# Altium PCB fmc-interposer.PcbDoc
Units mil, origin at the board's own origin, x right, y up, seen from the top; angles counter-clockwise.
Board outline 3543.31 x 3346.46 mil, 4 copper layers (Component Side, Ground Plane, Power Plane, Solder Side), stack 33.234 mil thick; 10 components, 68 nets, 318 pads, 77 vias.
Unrouted connection lines stored in the file: 24.
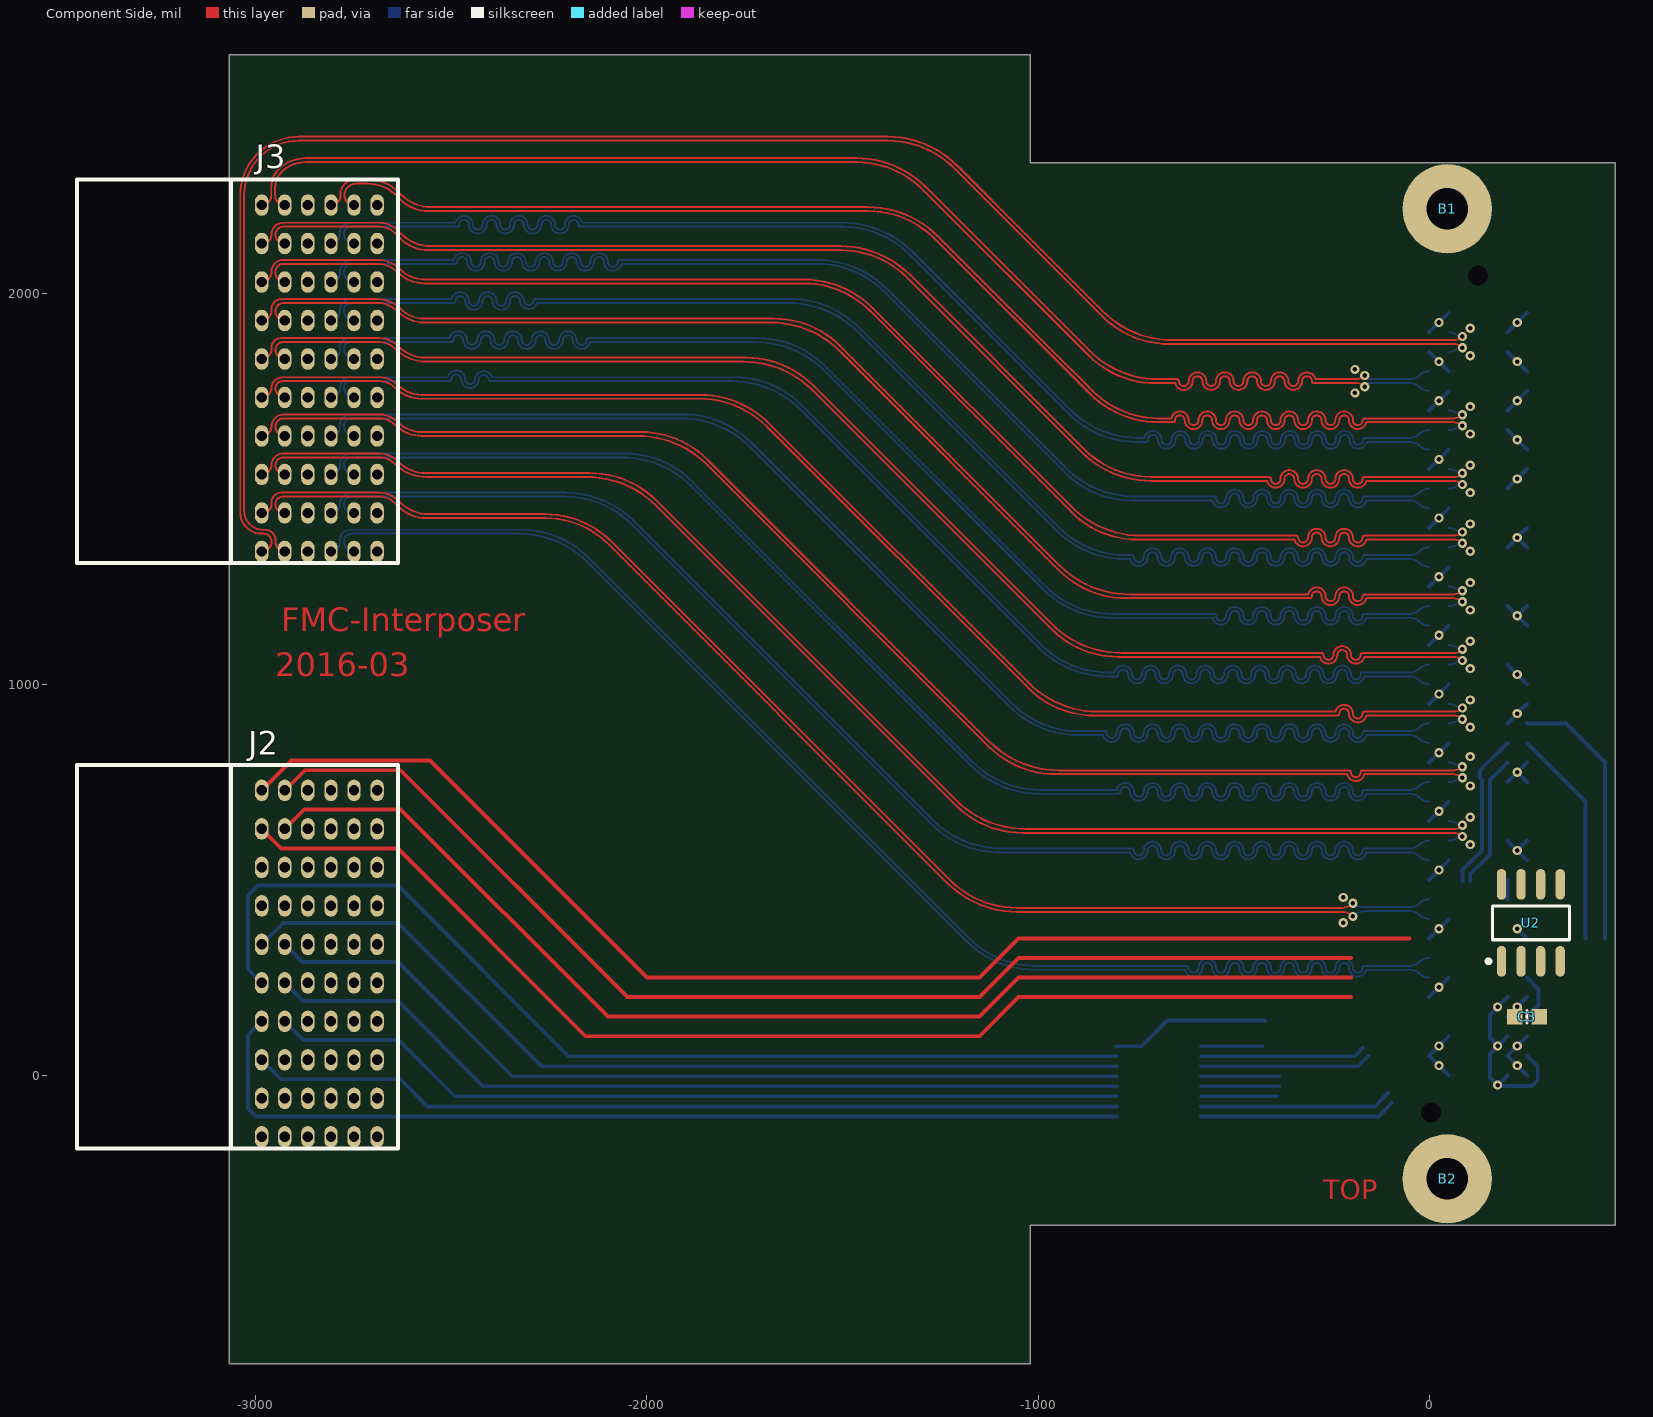
[diagram p0: Component Side view]
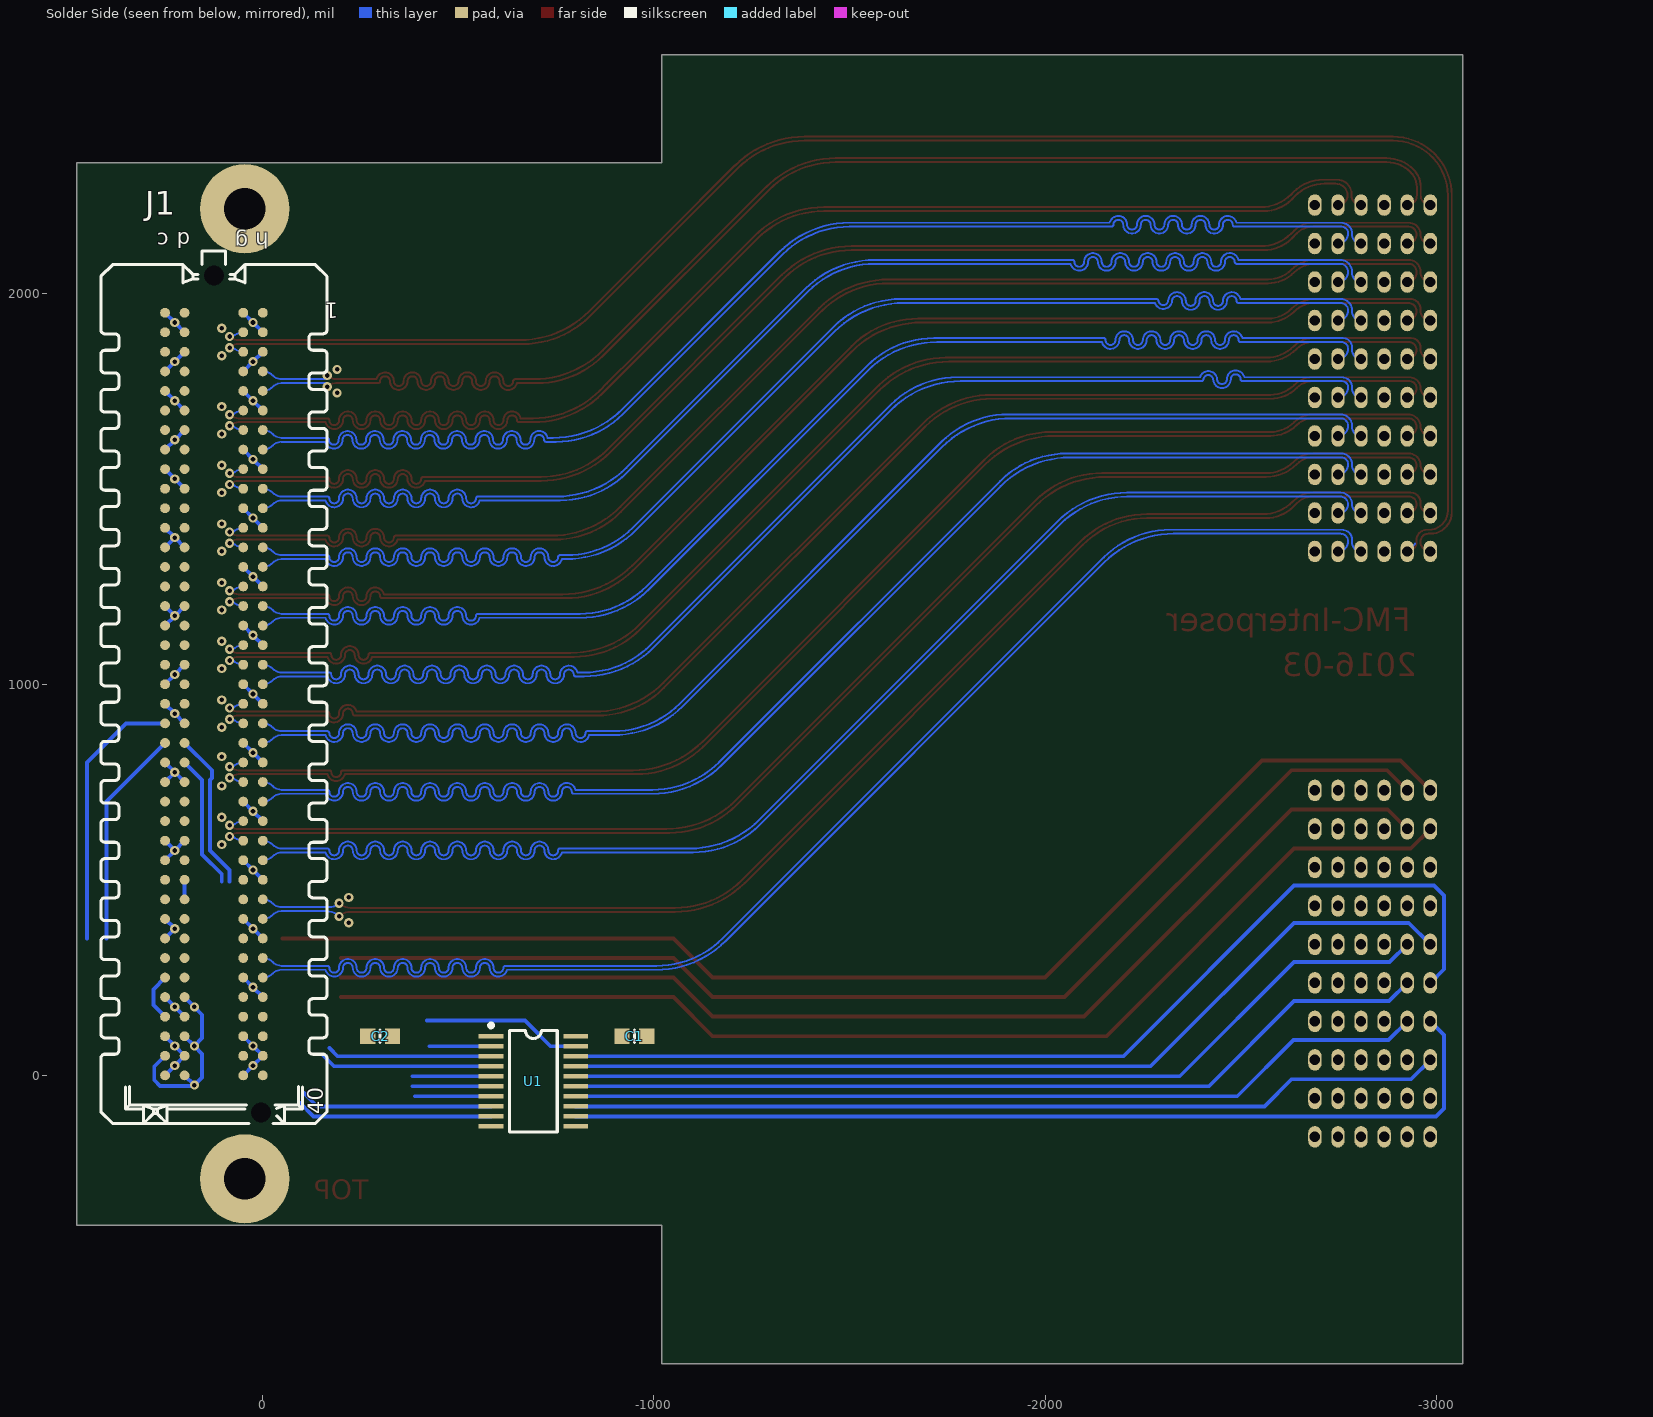
[diagram p1: Solder Side view, seen from below]
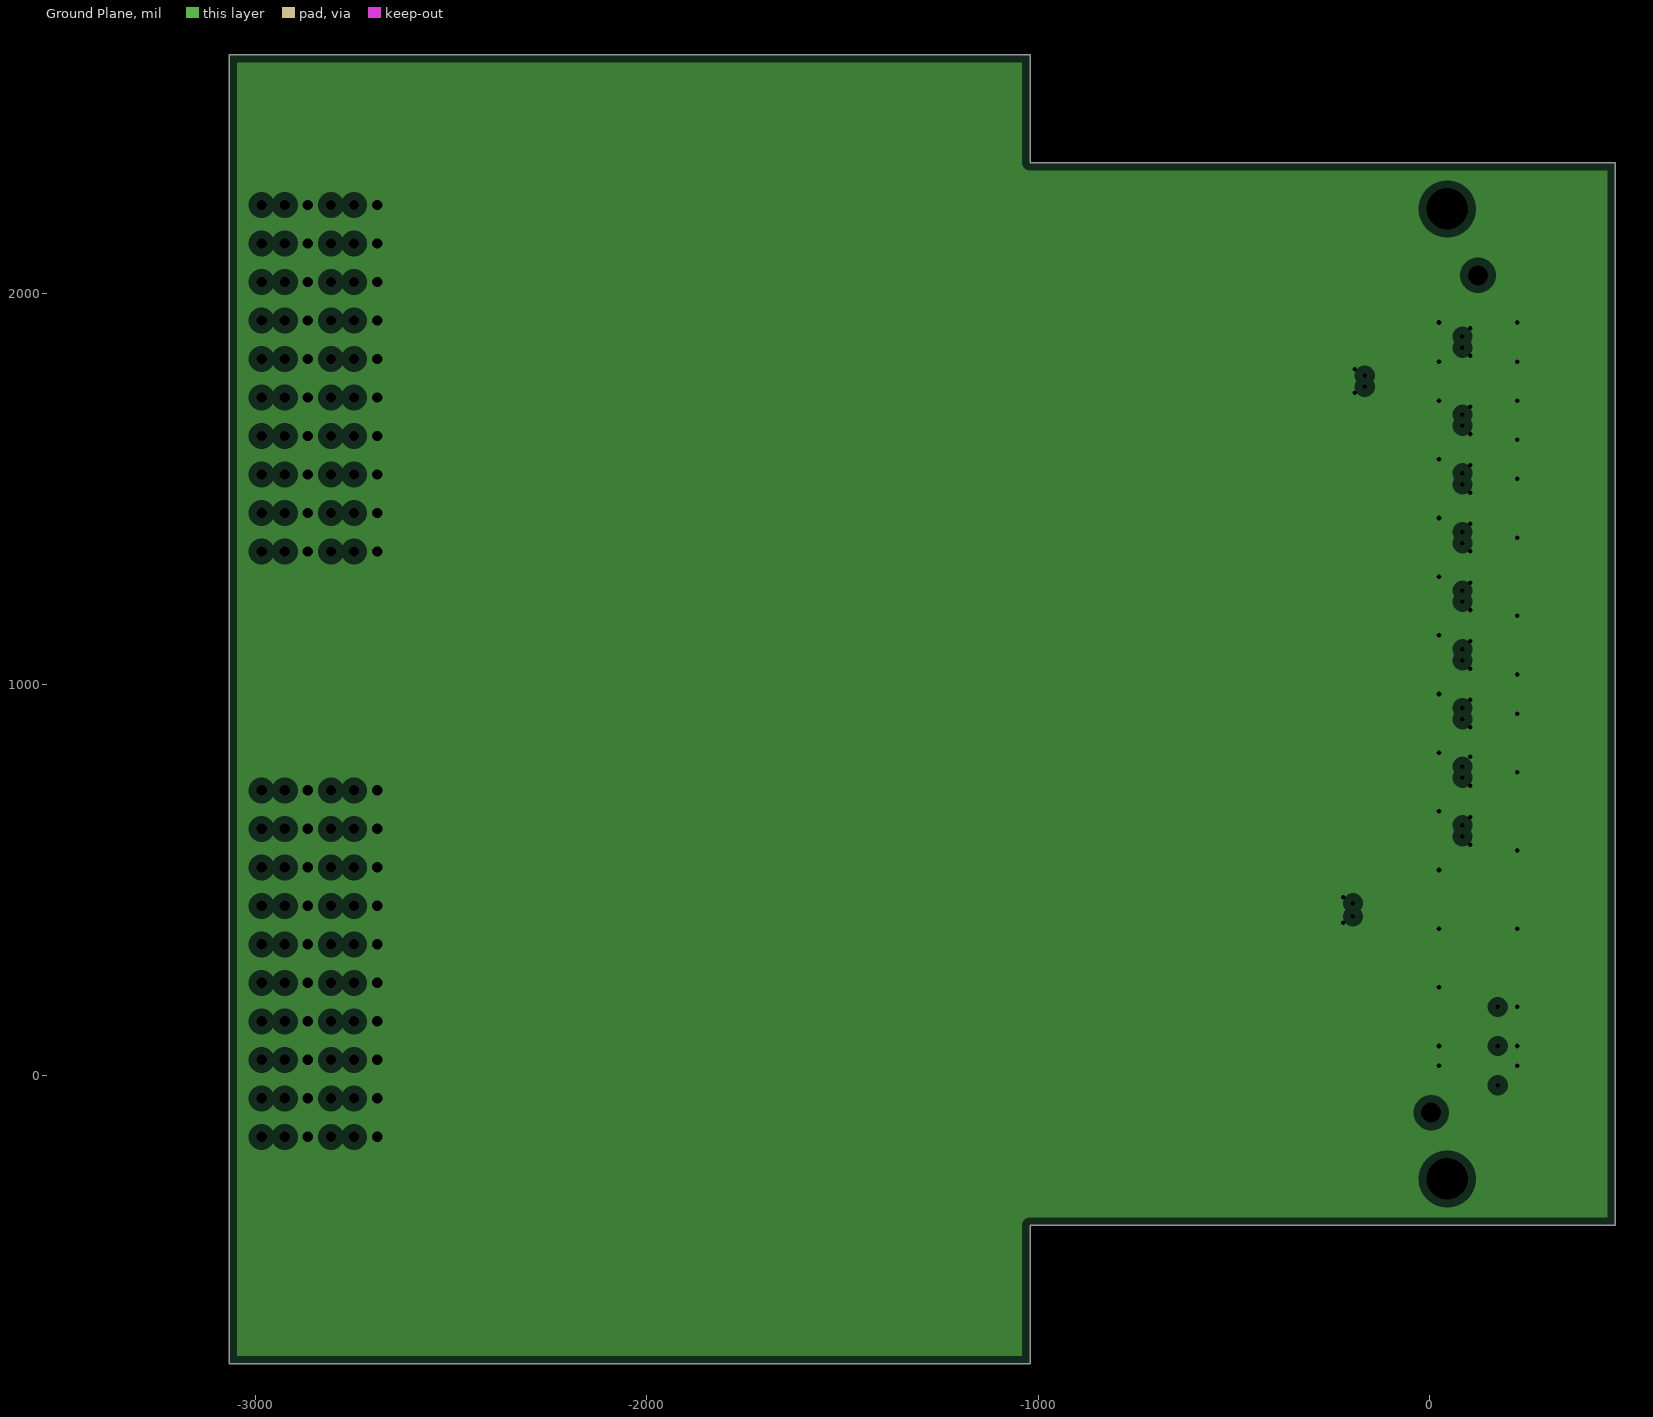
[diagram p2: Ground Plane, clearances drawn from the general rule]
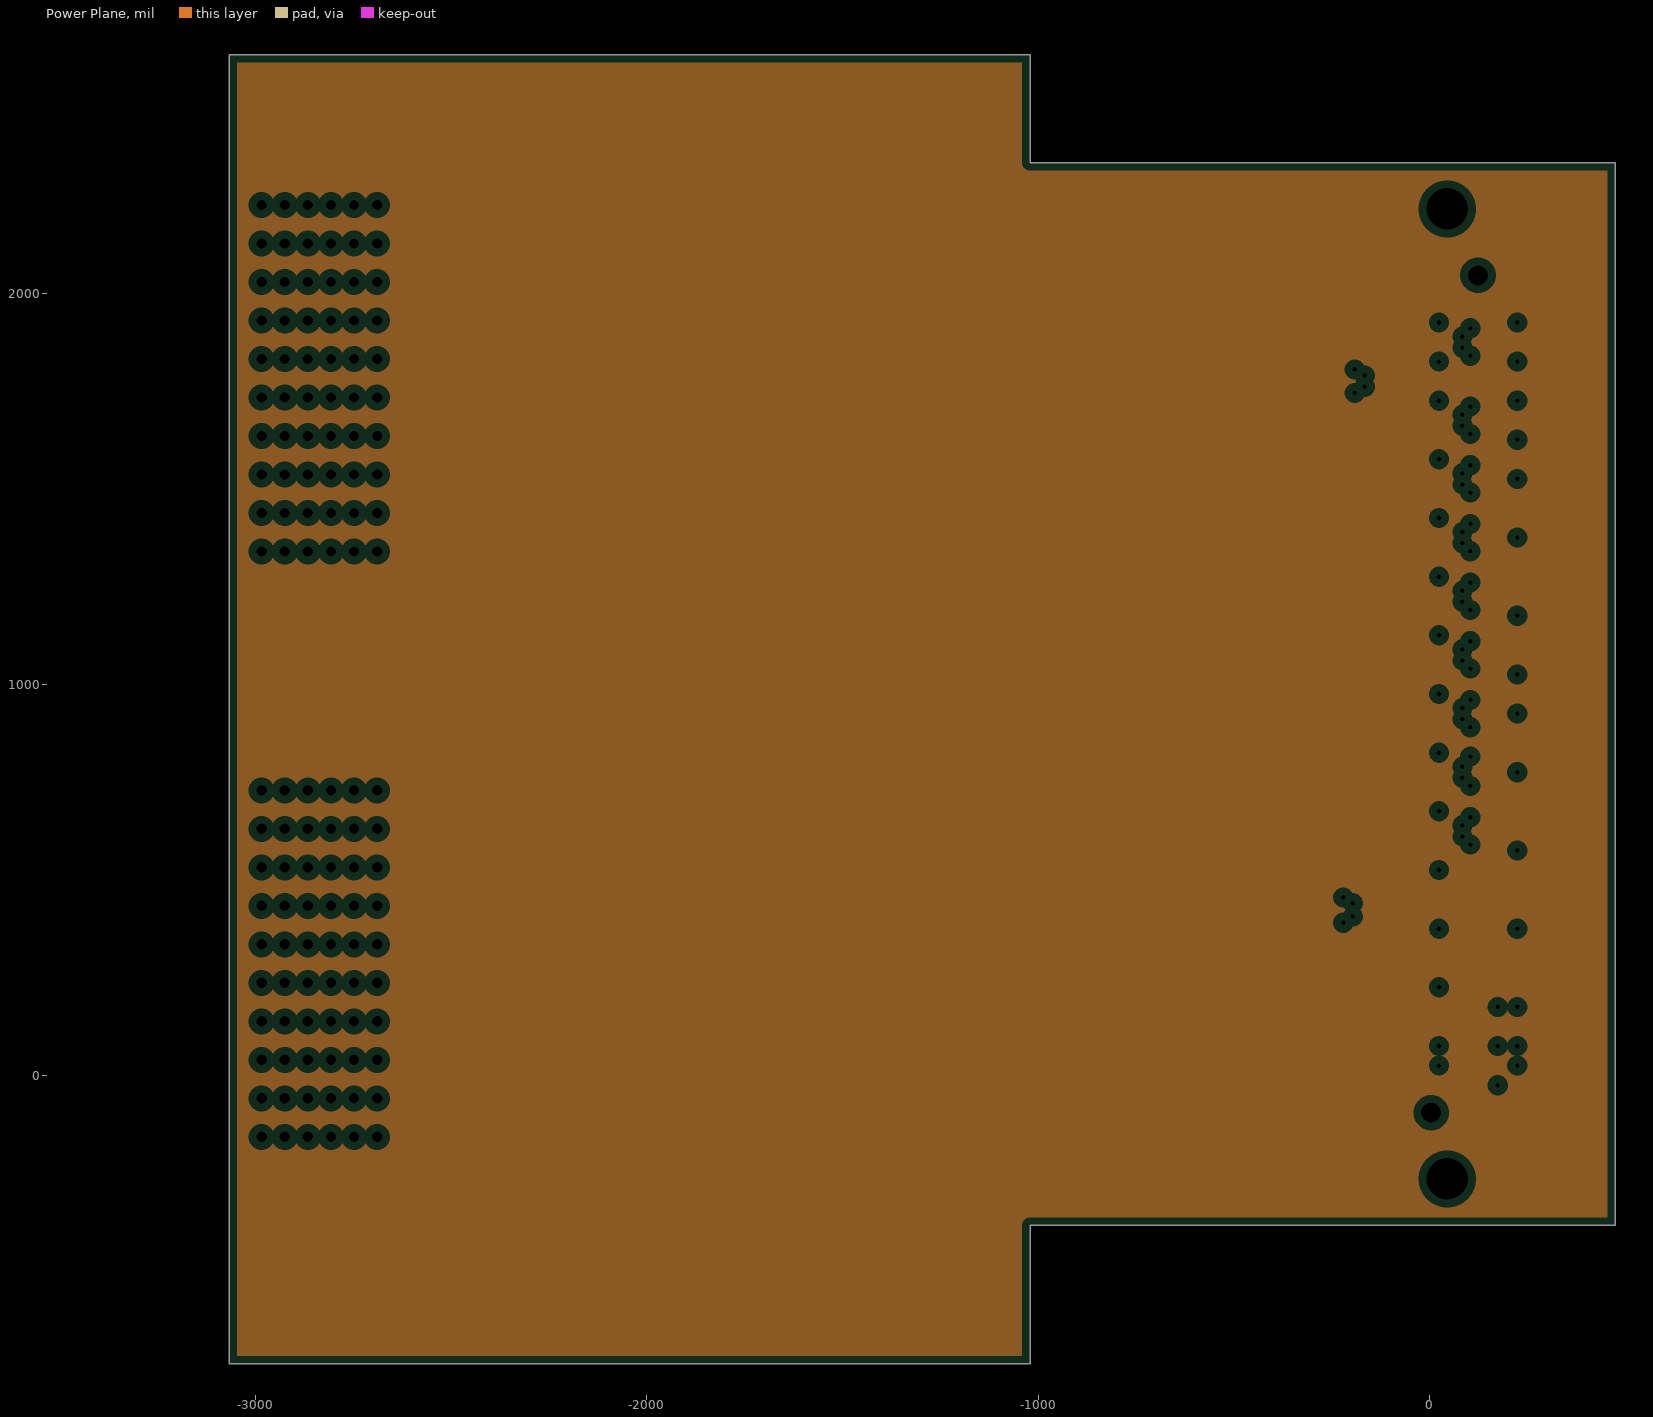
[diagram p3: Power Plane, clearances drawn from the general rule]

## Layer stack, top to bottom
Top Solder: solder mask 0.4, Solder Resist, Dk 3.5
Component Side: signal copper 1.4
Dielectric 1: core 12.6, FR-4, Dk 4.8
Ground Plane: plane copper 1.4169, net GND
Dielectric 3: prepreg 5, Dk 4.2
Power Plane: plane copper 1.4169
Dielectric 4: core 10, Dk 4.2
Solder Side: signal copper 1.4
Bottom Solder: solder mask 0.4, Solder Resist, Dk 3.5

## Board outline
-3067.91,-737.24 -3067.91,2609.21 -1020.67,2609.21 -1020.67,2333.62 475.39,2333.62 475.39,-382.91 -1020.67,-382.91 -1020.67,-737.24

## Design rules (kind name [scope] priority, off if disabled: settings)
Clearance Clearance_1 [All vs (InDifferentialPairClass('All Differential Pairs'))] p1: gap=5
Clearance [All] p2: gap=10
DiffPairsRouting [All] p1: maxlimit=10 minlimit=5 mostfreqgap=5 toplayer_minwidth=5 toplayer_maxwidth=15 toplayer_prefwidth=5 bottomlayer_minwidth=5 bottomlayer_maxwidth=15 bottomlayer_prefwidth=5 maxuncoupledlength=500
Length All [All] p1: maxlimit=3543.16 minlimit=0
PlaneClearance [All] p1: clearance=20
PlaneConnect PlaneConnect_1 [isVia] p1: planeconnectstyle=Direct reliefexpansion=20 reliefentries=4 reliefconductorwidth=10 reliefairgap=10
PlaneConnect [All] p2: planeconnectstyle=Relief reliefexpansion=20 reliefentries=4 reliefconductorwidth=20 reliefairgap=10
PolygonConnect [All] p1: connectstyle=Relief reliefconductorwidth=10 reliefentries=4 polygonreliefangle="90 Angle" airgapwidth=10
RoutingCorners [(InDifferentialPairClass('All Differential Pairs'))] p1: cornerstyle=Round minsetback=1000 maxsetback=100
RoutingCorners RoutingCorners_1 [All] p2: cornerstyle=45-Degree minsetback=100 maxsetback=100
RoutingVias [All] p1: holewidth=11.81 width=23.62 viastyle="Through Hole" minholewidth=11.81 minwidth=19.68 maxholewidth=11.81 maxwidth=23.62
SolderMaskExpansion [All] p1: expansion=4
Width [All] p1: maxlimit=100 minlimit=6 preferedwidth=10 minimp=50.000000 maximp=50.000000 favimp=50.000000
26 further rules are at their usual default settings.

## Classes and differential pairs
component class fmc-interposer: C1 C2 C3 J1 J2 J3 U1 U2
differential pair D15: +D15_P -D15_N
differential pair D14: +D14_P -D14_N
differential pair D13: +D13_P -D13_N
differential pair D12: +D12_P -D12_N
differential pair D11: +D11_P -D11_N
differential pair D10: +D10_P -D10_N
differential pair D9: +D9_P -D9_N
differential pair D8: +D8_P -D8_N
differential pair D7: +D7_P -D7_N
differential pair D6: +D6_P -D6_N
differential pair D5: +D5_P -D5_N
differential pair D4: +D4_P -D4_N
differential pair D3: +D3_P -D3_N
differential pair D2: +D2_P -D2_N
differential pair D1: +D1_P -D1_N
differential pair D0: +D0_P -D0_N
differential pair DCLK2: +DCLK2_P -DCLK2_N
differential pair D17: +D17_P -D17_N
differential pair D16: +D16_P -D16_N
differential pair DCLK1: +DCLK1_P -DCLK1_N

## Components (designator, comment, footprint, x,y, rotation, side; value= is the part's Value field where it differs from the comment)
B1 "Plated Hole" MTG300_600#1 -642.16,2053.94 r0 top locked
B2 "Plated Hole" MTG300_600#2 -542.16,-236.06 r0 top locked
C1 "100n" capc1608n -950,100 r180 bottom
C2 "100n" capc1608n -300,100 r0 bottom
C3 "100n" capc1608n 250,150 r0 top
J1 "VITA 57" SAMTEC_ASP-127797-01 125,975 r90 bottom locked
J2 "Control" Analog_Conn2 -2985.24,-157.24 r270 top locked
J3 "Data Lines" Analog_Conn2 -2985.24,1339.53 r270 top locked
U1 "TXB0108" TSSOP20 -691.73,-15.16 r270 bottom
U2 "M24C02MN6" SOP8_N 260,390 r90 top

## Footprints (in the part's own frame and the unit in brackets; to place one, negate y for a bottom-side part, rotate by r counter-clockwise, add the part's x,y. Pads: shape width x height; smd on the part's side, far side on the other; paste and mask are expansions set on the pad)
Analog_Conn2 [mm]
  oval 1.397x0.864 hole 0.675: A1(0,0) A2(-2.5,0) A3(-5,0) A4(-7.5,0) A5(-10,0) A6(-12.5,0) A7(-15,0) A8(-17.5,0) A9(-20,0) A10(-22.5,0) B1(0,1.5) B2(-2.5,1.5) B3(-5,1.5) B4(-7.5,1.5) B5(-10,1.5) B6(-12.5,1.5) B7(-15,1.5) B8(-17.5,1.5) B9(-20,1.5) B10(-22.5,1.5) BG1(0,3) BG2(-2.5,3) BG3(-5,3) BG4(-7.5,3) BG5(-10,3) BG6(-12.5,3) BG7(-15,3) BG8(-17.5,3) BG9(-20,3) BG10(-22.5,3) C1(0,4.5) C2(-2.5,4.5) C3(-5,4.5) C4(-7.5,4.5) C5(-10,4.5) C6(-12.5,4.5) C7(-15,4.5) C8(-17.5,4.5) C9(-20,4.5) C10(-22.5,4.5) D1(0,6) D2(-2.5,6) D3(-5,6) D4(-7.5,6) D5(-10,6) D6(-12.5,6) D7(-15,6) D8(-17.5,6) D9(-20,6) D10(-22.5,6) DG1(0,7.5) DG2(-2.5,7.5) DG3(-5,7.5) DG4(-7.5,7.5) DG5(-10,7.5) DG6(-12.5,7.5) DG7(-15,7.5) DG8(-17.5,7.5) DG9(-20,7.5) DG10(-22.5,7.5)
  silkscreen extent -24.15,-12 0.75,8.85
capc1608n [mm]
  rect 1x1 smd: 1(-0.803,-0.007) 2(0.797,-0.007)
  silkscreen extent 0,-0.41 0,0.39
MTG300_600#1 [mm] "Plated Through Hole: Hole Dia.=3.0mm Pad Dia.=6.0mm"
  round 5.8 hole 2.7: 1(17.486,4.104)
MTG300_600#2 [mm] "Plated Through Hole: Hole Dia.=3.0mm Pad Dia.=6.0mm"
  round 5.8 hole 2.7: 1(14.946,-0.73)
SAMTEC_ASP-127797-01 [mm] "Connector VITA 57, 160 Male contacts in 4 row cdgh"
  round 1 hole 1.3 unplated mask+0.3: 1(-27.191,-3.048) 2(27.191,0)
  round 0.64 smd: c1(24.765,3.175) c2(23.495,3.175) c3(22.225,3.175) c4(20.955,3.175) c5(19.685,3.175) c6(18.415,3.175) c7(17.145,3.175) c8(15.875,3.175) c9(14.605,3.175) c10(13.335,3.175) c11(12.065,3.175) c12(10.795,3.175) c13(9.525,3.175) c14(8.255,3.175) c15(6.985,3.175) c16(5.715,3.175) c17(4.445,3.175) c18(3.175,3.175) c19(1.905,3.175) c20(0.635,3.175) c21(-0.635,3.175) c22(-1.905,3.175) c23(-3.175,3.175) c24(-4.445,3.175) c25(-5.715,3.175) c26(-6.985,3.175) c27(-8.255,3.175) c28(-9.525,3.175) c29(-10.795,3.175) c30(-12.065,3.175) c31(-13.335,3.175) c32(-14.605,3.175) c33(-15.875,3.175) c34(-17.145,3.175) c35(-18.415,3.175) c36(-19.685,3.175) c37(-20.955,3.175) c38(-22.225,3.175) c39(-23.495,3.175) c40(-24.765,3.175) d1(24.765,1.905) d2(23.495,1.905) d3(22.225,1.905) d4(20.955,1.905) d5(19.685,1.905) d6(18.415,1.905) d7(17.145,1.905) d8(15.875,1.905) d9(14.605,1.905) d10(13.335,1.905) d11(12.065,1.905) d12(10.795,1.905) d13(9.525,1.905) d14(8.255,1.905) d15(6.985,1.905) d16(5.715,1.905) d17(4.445,1.905) d18(3.175,1.905) d19(1.905,1.905) d20(0.635,1.905) d21(-0.635,1.905) d22(-1.905,1.905) d23(-3.175,1.905) d24(-4.445,1.905) d25(-5.715,1.905) d26(-6.985,1.905) d27(-8.255,1.905) d28(-9.525,1.905) d29(-10.795,1.905) d30(-12.065,1.905) d31(-13.335,1.905) d32(-14.605,1.905) d33(-15.875,1.905) d34(-17.145,1.905) d35(-18.415,1.905) d36(-19.685,1.905) d37(-20.955,1.905) d38(-22.225,1.905) d39(-23.495,1.905) d40(-24.765,1.905) g1(24.765,-1.905) g2(23.495,-1.905) g3(22.225,-1.905) g4(20.955,-1.905) g5(19.685,-1.905) g6(18.415,-1.905) g7(17.145,-1.905) g8(15.875,-1.905) g9(14.605,-1.905) g10(13.335,-1.905) g11(12.065,-1.905) g12(10.795,-1.905) g13(9.525,-1.905) g14(8.255,-1.905) g15(6.985,-1.905) g16(5.715,-1.905) g17(4.445,-1.905) g18(3.175,-1.905) g19(1.905,-1.905) g20(0.635,-1.905) g21(-0.635,-1.905) g22(-1.905,-1.905) g23(-3.175,-1.905) g24(-4.445,-1.905) g25(-5.715,-1.905) g26(-6.985,-1.905) g27(-8.255,-1.905) g28(-9.525,-1.905) g29(-10.795,-1.905) g30(-12.065,-1.905) g31(-13.335,-1.905) g32(-14.605,-1.905) g33(-15.875,-1.905) g34(-17.145,-1.905) g35(-18.415,-1.905) g36(-19.685,-1.905) g37(-20.955,-1.905) g38(-22.225,-1.905) g39(-23.495,-1.905) g40(-24.765,-1.905) h1(24.765,-3.175) h2(23.495,-3.175) h3(22.225,-3.175) h4(20.955,-3.175) h5(19.685,-3.175) h6(18.415,-3.175) h7(17.145,-3.175) h8(15.875,-3.175) h9(14.605,-3.175) h10(13.335,-3.175) h11(12.065,-3.175) h12(10.795,-3.175) h13(9.525,-3.175) h14(8.255,-3.175) h15(6.985,-3.175) h16(5.715,-3.175) h17(4.445,-3.175) h18(3.175,-3.175) h19(1.905,-3.175) h20(0.635,-3.175) h21(-0.635,-3.175) h22(-1.905,-3.175) h23(-3.175,-3.175) h24(-4.445,-3.175) h25(-5.715,-3.175) h26(-6.985,-3.175) h27(-8.255,-3.175) h28(-9.525,-3.175) h29(-10.795,-3.175) h30(-12.065,-3.175) h31(-13.335,-3.175) h32(-14.605,-3.175) h33(-15.875,-3.175) h34(-17.145,-3.175) h35(-18.415,-3.175) h36(-19.685,-3.175) h37(-20.955,-3.175) h38(-22.225,-3.175) h39(-23.495,-3.175) h40(-24.765,-3.175)
  silkscreen extent -27.89,-7.34 28.78,7.34, body extent -27.89,-7.34 28.78,7.34, height 5.61
SOP8_N [mm] "SOIC, 8-Leads, Body 4.9x3.9mm, Pitch 1.27mm, IPC Medium Density"
  oval 2x0.6 smd: 1(-2.5,1.905) 2(-2.5,0.635) 3(-2.5,-0.635) 4(-2.5,-1.905) 5(2.5,-1.905) 6(2.5,-0.635) 7(2.5,0.635) 8(2.5,1.905)
  silkscreen extent -2.62,-2.5 1.1,2.88, body extent -2,-2.5 2,2.5, height 1.75
TSSOP20 [mm] "Shrink Small Outline; 20 Leads; Body Width 4.4 mm; Pitch 0.65 mm"
  rect 0.3x1.6 smd: 1(-2.925,-2.75) 2(-2.275,-2.75) 3(-1.625,-2.75) 4(-0.975,-2.75) 5(-0.325,-2.75) 6(0.325,-2.75) 7(0.975,-2.75) 8(1.625,-2.75) 9(2.275,-2.75) 10(2.925,-2.75) 11(2.925,2.75) 12(2.275,2.75) 13(1.625,2.75) 14(0.975,2.75) 15(0.325,2.75) 16(-0.325,2.75) 17(-0.975,2.75) 18(-1.625,2.75) 19(-2.275,2.75) 20(-2.925,2.75)
  silkscreen extent -3.75,-2.87 3.3,1.55

## Part data
B1 B2: library part PLATED_HOLE3.0_PAD6.0, "Single Terminal Socket"
C1 C2 C3: library part Cap, "Capacitor"
J1: "Connector VITA 57, 160 Male contacts in 4 row cdgh"
J2 J3: library part Analog_Conn2
U2: "2Kbit Serial I²C Bus EEPROM"

## Via types
v1: diameter 23.62, hole 11.81, Component Side to Solder Side, tented both sides, 52 vias
v2: diameter 23.62, hole 11.81, Component Side to Solder Side, 25 vias

## Nets (pads, with @x,y where several pads share a name; then routed paths per layer and width w, separated by ;. In a path a pad name is that pad's centre, name@x,y a point inside that pad or via, vN(x,y) a via of type N, cw(c..) or ccw(c..) an arc to the next point about the centre after c; other vN are vias at no path point)
3P3V: C1.2 J1.c39 J1.d36 J1.d38 J1.d40 U1.19 | length 930.2
  Solder Side w10: U1.19 -735.59,74.41 -670,140 -420,140 ; J1.d40 v2(175,-25) ; J1.d38 v2(175,75) ; J1.d36 v2(175,175) 155,155 155,95 v2(175,75) ; J1.c39 277.6,22.4 277.6,-12.4 262.4,-27.6 177.6,-27.6 v2(175,-25) ; v2(175,-25) 155,-5 155,55 v2(175,75)
3P3VAUX: C3.2 J1.d32 U2.8
12P0V: J1.c35 J1.c37 | length 124.9
  Solder Side w10: J1.c37 280,180 280,220 J1.c35
CSB1_C: J1.d26 U1.4 | length 439.6
  Solder Side w10: U1.4 -181.77,23.23 -155,50
CSB1_M: J2.A6 U1.17 | length 2360
  Solder Side w10: J2.A6 -2930.12,390 -2636.81,390 -2270.04,23.23 U1.17
CSB2_C: J1.d27 U1.3 | length 422.2
  Solder Side w10: U1.3 -191.18,48.82 -170,70
CSB2_M: J2.A5 U1.18 | length 2649
  Solder Side w10: J2.A5 -3020,271.22 -3020,460 -2995,485 -2636.81,485 -2200.63,48.82 U1.18
CSB3_C: J1.c26 U1.9 | length 502.8
  Solder Side w10: U1.9 -129.72,-104.72 -95,-70
CSB3_M: J2.A4 U1.12 | length 2465.8
  Solder Side w10: J2.A4 -3020,103.27 -3020,-85 -3000,-105 -2636.81,-105 -2636.54,-104.72 U1.12
CSB4_C: J1.c27 U1.8 | length 492.6
  Solder Side w10: U1.8 -139.13,-79.13 -105,-45
CSB4_M: J2.A3 U1.13 | length 2234.4
  Solder Side w10: J2.A3 -2935.63,-10 -2630,-10 -2560.87,-79.13 U1.13
D0_N: J1.h35 J3.D1 | length 3528.9
  Solder Side w5: J3.D1 cw(c-2749.02,1365.51) -2775,1365.51 cw(c-2755.51,1365.51) -2755.51,1385 -2328.97,1385 cw(c-2328.97,1134) -2151.51,1311.51 ; -2151.48,1311.48 -1183.52,343.52 ; -1183.49,343.49 ccw(c-1006.03,521) -1006.03,270 -624.44,270 ccw(c-602.5,275) -580,275 cw(c-567.5,275) -555,275 ccw(c-532.5,275) -510,275 cw(c-497.5,275) -485,275 ccw(c-462.5,275) -440,275 cw(c-427.5,275) -415,275 ccw(c-392.5,275) -370,275 cw(c-357.5,275) -345,275 ccw(c-322.5,275) -300,275 cw(c-287.5,275) -275,275 ccw(c-252.5,275) -230,275 cw(c-217.5,275) -205,275 ccw(c-182.5,275) -160.56,270 -48.28,270 cw(c-48.28,238.17) -25.77,260.68 ccw(c0,286.45) J1.h35
D0_P: J1.h34 J3.C1 | length 3548.9
  Solder Side w5: J3.C1 ccw(c-2808.07,1362.6) -2785,1362.6 -2785,1369.65 cw(c-2759.65,1369.65) -2759.65,1395 -2320.68,1395 cw(c-2320.68,1154) -2150.27,1324.41 -1176.44,350.59 ccw(c-1006.03,521) -1006.03,280 -620,280 cw(c-620,275) -615,275 ccw(c-602.5,275) -590,275 cw(c-567.5,275) -545,275 ccw(c-532.5,275) -520,275 cw(c-497.5,275) -475,275 ccw(c-462.5,275) -450,275 cw(c-427.5,275) -405,275 ccw(c-392.5,275) -380,275 cw(c-357.5,275) -335,275 ccw(c-322.5,275) -310,275 cw(c-287.5,275) -265,275 ccw(c-252.5,275) -240,275 cw(c-217.5,275) -195,275 ccw(c-182.5,275) -170,275 cw(c-165,275) -165,280 -48.28,280 ccw(c-48.28,311.83) -25.77,289.32 cw(c0,263.55) J1.h34
D1_N: J1.h32 J3.B2 | length 3422.6
  Component Side w5: J3.B2 -2927.95,1437.95 cw(c-2927.95,1460) -2950,1460 -2950,1460.86 cw(c-2930.86,1460.86) -2930.86,1480 -2685.1,1480 cw(c-2685.1,1421.72) -2643.88,1462.93 -2635.24,1454.29 ccw(c-2564.53,1525) -2564.53,1425 -2261.07,1425 cw(c-2261.07,1193.08) -2097.12,1357.13 cw(c-2261.07,1193.08) -2097.07,1357.07 -1231.71,491.71 ccw(c-1054.22,669.19) -1054.22,418.19 -223.51,418.19 cw(c-223.51,377.86) v2(-195,406.38)
  Solder Side w5: v2(-195,406.38) cw(c-162.11,373.49) -162.11,420 -48.28,420 cw(c-48.28,388.17) -25.77,410.68 ccw(c0,436.45) J1.h32
D1_P: J1.h31 J3.A2 | length 3439.7
  Component Side w5: J3.A2 -2982.05,1437.95 ccw(c-2982.05,1460) -2960,1460 -2960,1465 cw(c-2935,1465) -2935,1490 -2685.1,1490 cw(c-2685.1,1421.72) -2636.81,1470 -2634.03,1467.22 ccw(c-2556.25,1545) -2556.25,1435 -2260.68,1435 cw(c-2260.68,1194) -2090.27,1364.41 -1224.63,498.78 ccw(c-1054.22,669.19) -1054.22,428.19 -223.51,428.19 ccw(c-223.51,468.51) v2(-195,440)
  Solder Side w5: v2(-195,440) ccw(c-170.86,464.14) -170.86,430 -48.28,430 ccw(c-48.28,461.83) -25.77,439.32 cw(c0,413.55) J1.h31
D2_N: J1.h29 J3.D2 | length 3522.9
  Solder Side w5: J3.D2 -2752.95,1437.95 cw(c-2752.95,1460) -2775,1460 cw(c-2755,1460) -2755,1480 -2209.83,1480 cw(c-2209.83,1239) -2039.41,1409.41 -1270.59,640.59 ccw(c-1100.17,811) -1100.17,570 -764.44,570 ccw(c-742.5,575) -720,575 cw(c-707.5,575) -695,575 ccw(c-672.5,575) -650,575 cw(c-637.5,575) -625,575 ccw(c-602.5,575) -580,575 cw(c-567.5,575) -555,575 ccw(c-532.5,575) -510,575 cw(c-497.5,575) -485,575 ccw(c-462.5,575) -440,575 cw(c-427.5,575) -415,575 ccw(c-392.5,575) -370,575 cw(c-357.5,575) -345,575 ccw(c-322.5,575) -300,575 cw(c-287.5,575) -275,575 ccw(c-252.5,575) -230,575 cw(c-217.5,575) -205,575 ccw(c-182.5,575) -160.56,570 -48.28,570 cw(c-48.28,538.17) -25.77,560.68 ccw(c0,586.45) J1.h29
D2_P: J1.h28 J3.C2 | length 3538
  Solder Side w5: J3.C2 -2807.05,1437.95 ccw(c-2807.05,1460) -2785,1460 cw(c-2755,1460) -2755,1490 -2209.83,1490 cw(c-2209.83,1239) -2032.37,1416.51 ; -2032.34,1416.48 -1269.37,653.52 ccw(c-1091.89,831) -1091.89,580 -760,580 cw(c-760,575) -755,575 ccw(c-742.5,575) -730,575 cw(c-707.5,575) -685,575 ccw(c-672.5,575) -660,575 cw(c-637.5,575) -615,575 ccw(c-602.5,575) -590,575 cw(c-567.5,575) -545,575 ccw(c-532.5,575) -520,575 cw(c-497.5,575) -475,575 ccw(c-462.5,575) -450,575 cw(c-427.5,575) -405,575 ccw(c-392.5,575) -380,575 cw(c-357.5,575) -335,575 ccw(c-322.5,575) -310,575 cw(c-287.5,575) -265,575 ccw(c-252.5,575) -240,575 cw(c-217.5,575) -195,575 ccw(c-182.5,575) -170,575 cw(c-165,575) -165,580 -48.28,580 ccw(c-48.28,611.83) -25.77,589.32 cw(c0,563.55) J1.h28
D3_N: J1.g28 J3.B3 | length 3493.3
  Component Side w5: J3.B3 cw(c-2926.18,1560.2) -2950,1560.2 cw(c-2930.2,1560.2) -2930.2,1580 -2685.1,1580 cw(c-2685.1,1521.72) -2643.88,1562.93 -2643.17,1562.22 ccw(c-2565.39,1640) -2565.39,1530 -2153.97,1530 cw(c-2153.97,1279) -1976.51,1456.51 ; -1976.48,1456.48 -1210.59,690.59 ccw(c-1040.17,861) -1040.17,620 62.52,620 cw(c62.52,588.21) v2(85,610.69)
  Solder Side w5: J1.g28 ccw(c50,636.45) v2@75.77,610.68 ; v2@75.79,610.69 v2(85,610.69)
D3_P: J1.g27 J3.A3 | length 3511.2
  Component Side w5: J3.A3 ccw(c-2985.24,1561.61) -2960,1561.61 ; -2960,1560.2 cw(c-2930.2,1560.2) -2930.2,1590 -2685.1,1590 cw(c-2685.1,1521.72) -2636.81,1570 -2636.1,1569.29 ccw(c-2565.39,1640) -2565.39,1540 -2145.68,1540 cw(c-2145.68,1299) -1975.27,1469.41 -1209.37,703.52 ccw(c-1031.89,881) -1031.89,630 62.52,630 ccw(c62.52,661.79) v2(85,639.31)
  Solder Side w5: J1.g27 cw(c50,613.55) 75.77,639.32 v2(85,639.31)
D4_N: J1.h26 J3.D3 | length 3523.8
  Solder Side w5: J3.D3 cw(c-2749.02,1562.36) -2775,1562.36 cw(c-2757.36,1562.36) -2757.36,1580 -2063.97,1580 cw(c-2063.97,1329) -1886.51,1506.51 ; -1886.48,1506.48 -1173.52,793.52 ; -1173.49,793.49 ccw(c-996.03,971) -996.03,720 -795,720 ccw(c-795,725) -790,725 cw(c-777.5,725) -765,725 ccw(c-742.5,725) -720,725 cw(c-707.5,725) -695,725 ccw(c-672.5,725) -650,725 cw(c-637.5,725) -625,725 ccw(c-602.5,725) -580,725 cw(c-567.5,725) -555,725 ccw(c-532.5,725) -510,725 cw(c-497.5,725) -485,725 ccw(c-462.5,725) -440,725 cw(c-427.5,725) -415,725 ccw(c-392.5,725) -370,725 cw(c-357.5,725) -345,725 ccw(c-322.5,725) -300,725 cw(c-287.5,725) -275,725 ccw(c-252.5,725) -230,725 cw(c-217.5,725) -205,725 ccw(c-182.5,725) -160.56,720 -48.28,720 cw(c-48.28,688.17) -25.77,710.68 ccw(c0,736.45) J1.h26
D4_P: J1.h25 J3.C3 | length 3538.7
  Solder Side w5: J3.C3 ccw(c-2808.07,1559.45) -2785,1559.45 -2785,1562.36 cw(c-2757.36,1562.36) -2757.36,1590 -2055.68,1590 cw(c-2055.68,1349) -1885.27,1519.41 -1166.44,800.59 ccw(c-996.03,971) -996.03,730 -799.44,730 cw(c-777.5,725) -755,725 ccw(c-742.5,725) -730,725 cw(c-707.5,725) -685,725 ccw(c-672.5,725) -660,725 cw(c-637.5,725) -615,725 ccw(c-602.5,725) -590,725 cw(c-567.5,725) -545,725 ccw(c-532.5,725) -520,725 cw(c-497.5,725) -475,725 ccw(c-462.5,725) -450,725 cw(c-427.5,725) -405,725 ccw(c-392.5,725) -380,725 cw(c-357.5,725) -335,725 ccw(c-322.5,725) -310,725 cw(c-287.5,725) -265,725 ccw(c-252.5,725) -240,725 cw(c-217.5,725) -195,725 ccw(c-182.5,725) -170,725 cw(c-165,725) -165,730 -48.28,730 ccw(c-48.28,761.83) -25.77,739.32 cw(c0,713.55) J1.h25
D5_N: J1.g25 J3.B4 | length 3490.8
  Component Side w5: J3.B4 cw(c-2926.18,1658.62) -2950,1658.62 cw(c-2928.62,1658.62) -2928.62,1680 -2685.1,1680 cw(c-2685.1,1621.72) -2643.88,1662.93 ccw(c-2576.46,1730.36) -2576.46,1635 -2023.97,1635 cw(c-2023.97,1384) -1846.51,1561.51 ; -1846.48,1561.48 -1125.59,840.59 ccw(c-955.17,1011) -955.17,770 -946.89,770 -209.44,770 ccw(c-187.5,775) -165.56,770 62.52,770 cw(c62.52,738.21) v2(85,760.69)
  Solder Side w5: J1.g25 ccw(c50,786.45) v2@75.77,760.68 ; v2@75.79,760.69 v2(85,760.69)
D5_P: J1.g24 J3.A4 | length 3512
  Component Side w5: J3.A4 ccw(c-2985.24,1660.04) -2960,1660.04 ; -2960,1658.62 cw(c-2928.62,1658.62) -2928.62,1690 -2685.1,1690 cw(c-2685.1,1621.72) -2636.81,1670 ccw(c-2576.46,1730.36) -2576.46,1645 -2015.68,1645 cw(c-2015.68,1404) -1845.27,1574.41 -1124.37,853.52 ccw(c-946.89,1031) -946.89,780 -205,780 cw(c-205,775) -200,775 ccw(c-187.5,775) -175,775 cw(c-170,775) -170,780 62.52,780 ccw(c62.52,811.79) v2(85,789.31)
  Solder Side w5: J1.g24 cw(c50,763.55) 75.77,789.32 v2(85,789.31)
D6_N: J1.h23 J3.D4 | length 3522.3
  Solder Side w5: J3.D4 cw(c-2749.02,1660.79) -2775,1660.79 cw(c-2755.79,1660.79) -2755.79,1680 -1913.97,1680 cw(c-1913.97,1429) -1736.51,1606.51 ; -1736.48,1606.48 -1073.52,943.52 ; -1073.49,943.49 ccw(c-896.03,1121) -896.03,870 -834.44,870 ccw(c-812.5,875) -790,875 cw(c-777.5,875) -765,875 ccw(c-742.5,875) -720,875 cw(c-707.5,875) -695,875 ccw(c-672.5,875) -650,875 cw(c-637.5,875) -625,875 ccw(c-602.5,875) -580,875 cw(c-567.5,875) -555,875 ccw(c-532.5,875) -510,875 cw(c-497.5,875) -485,875 ccw(c-462.5,875) -440,875 cw(c-427.5,875) -415,875 ccw(c-392.5,875) -370,875 cw(c-357.5,875) -345,875 ccw(c-322.5,875) -300,875 cw(c-287.5,875) -275,875 ccw(c-252.5,875) -230,875 cw(c-217.5,875) -205,875 ccw(c-182.5,875) -160.56,870 -48.28,870 cw(c-48.28,838.17) -25.77,860.68 ccw(c0,886.45) J1.h23
D6_P: J1.h22 J3.C4 | length 3540.5
  Solder Side w5: J3.C4 ccw(c-2808.07,1657.87) -2785,1657.87 -2785,1660.79 cw(c-2755.79,1660.79) -2755.79,1690 -1905.68,1690 cw(c-1905.68,1449) -1735.27,1619.41 -1066.44,950.59 ccw(c-896.03,1121) -896.03,880 -830,880 cw(c-830,875) -825,875 ccw(c-812.5,875) -800,875 cw(c-777.5,875) -755,875 ccw(c-742.5,875) -730,875 cw(c-707.5,875) -685,875 ccw(c-672.5,875) -660,875 cw(c-637.5,875) -615,875 ccw(c-602.5,875) -590,875 cw(c-567.5,875) -545,875 ccw(c-532.5,875) -520,875 cw(c-497.5,875) -475,875 ccw(c-462.5,875) -450,875 cw(c-427.5,875) -405,875 ccw(c-392.5,875) -380,875 cw(c-357.5,875) -335,875 ccw(c-322.5,875) -310,875 cw(c-287.5,875) -265,875 ccw(c-252.5,875) -240,875 cw(c-217.5,875) -195,875 ccw(c-182.5,875) -170,875 cw(c-165,875) -165,880 -48.28,880 ccw(c-48.28,911.83) -25.77,889.32 cw(c0,863.55) J1.h22
D7_N: J1.g22 J3.B5 | length 3488.1
  Component Side w5: J3.B5 cw(c-2926.18,1757.05) -2950,1757.05 cw(c-2932.05,1757.05) -2932.05,1775 -2685.1,1775 cw(c-2685.1,1716.72) -2643.88,1757.93 ccw(c-2576.46,1825.36) -2576.46,1730 -1864.83,1730 cw(c-1864.83,1489) -1694.41,1659.41 -1025.59,990.59 ccw(c-855.17,1161) -855.17,920 -846.89,920 -235,920 ccw(c-235,925) -230,925 cw(c-217.5,925) -205,925 ccw(c-182.5,925) -160.56,920 62.52,920 cw(c62.52,888.21) v2(85,910.69)
  Solder Side w5: J1.g22 ccw(c50,936.45) v2@75.77,910.68 ; v2@75.79,910.69 v2(85,910.69)
D7_P: J1.g21 J3.A5 | length 3505.1
  Component Side w5: J3.A5 ccw(c-2985.24,1758.47) -2960,1758.47 ; -2960,1757.05 cw(c-2932.05,1757.05) -2932.05,1785 -2685.1,1785 cw(c-2685.1,1716.72) -2636.81,1765 ccw(c-2576.46,1825.36) -2576.46,1740 -1864.83,1740 cw(c-1864.83,1489) -1687.37,1666.51 ; -1687.34,1666.48 -1024.37,1003.52 ccw(c-846.89,1181) -846.89,930 -239.44,930 cw(c-217.5,925) -195,925 ccw(c-182.5,925) -170,925 cw(c-165,925) -165,930 62.52,930 ccw(c62.52,961.79) v2(85,939.31)
  Solder Side w5: J1.g21 cw(c50,913.55) 75.77,939.32 v2(85,939.31)
D8_N: J1.h20 J3.D5 | length 3535.7
  Solder Side w5: J3.D5 cw(c-2749.02,1759.21) -2775,1759.21 cw(c-2759.21,1759.21) -2759.21,1775 -2505,1775 ccw(c-2505,1780) -2500,1780 cw(c-2487.5,1780) -2475,1780 ccw(c-2452.5,1780) -2430,1779.69 cw(c-2417.5,1778.11) -2404.97,1779.46 ccw(c-2400,1780) -2400,1775 -1783.97,1775 cw(c-1783.97,1524) -1606.51,1701.51 ; -1606.48,1701.48 -998.52,1093.52 ; -998.49,1093.49 ccw(c-821.03,1271) -821.03,1020 -800,1020 ccw(c-800,1025) -795,1025 cw(c-782.5,1025) -770,1025 ccw(c-747.5,1025) -725,1025 cw(c-712.5,1025) -700,1025 ccw(c-677.5,1025) -655,1025 cw(c-642.5,1025) -630,1025 ccw(c-607.5,1025) -585,1025 cw(c-572.5,1025) -560,1025 ccw(c-537.5,1025) -515,1025 cw(c-502.5,1025) -490,1025 ccw(c-467.5,1025) -445,1025 cw(c-432.5,1025) -420,1025 ccw(c-397.5,1025) -375,1025 cw(c-362.5,1025) -350,1025 ccw(c-327.5,1025) -305,1025 cw(c-292.5,1025) -280,1025 ccw(c-257.5,1025) -235,1025 cw(c-222.5,1025) -210,1025 ccw(c-187.5,1025) -165.56,1020 -48.28,1020 cw(c-48.28,988.17) -25.77,1010.68 ccw(c0,1036.45) J1.h20
D8_P: J1.h19 J3.C5 | length 3547.2
  Solder Side w5: J3.C5 ccw(c-2808.07,1756.3) -2785,1756.3 -2785,1759.21 cw(c-2759.21,1759.21) -2759.21,1785 -2509.44,1785 cw(c-2487.5,1780) -2465,1780 ccw(c-2452.5,1780) -2440,1780 ; -2439.97,1780.54 cw(c-2417.5,1778.11) -2395.97,1785 -1775.68,1785 cw(c-1775.68,1544) -1605.27,1714.41 -991.44,1100.59 ccw(c-821.03,1271) -821.04,1030 -804.44,1030 cw(c-782.5,1025) -760,1025 ccw(c-747.5,1025) -735,1025 cw(c-712.5,1025) -690,1025 ccw(c-677.5,1025) -665,1025 cw(c-642.5,1025) -620,1025 ccw(c-607.5,1025) -595,1025 cw(c-572.5,1025) -550,1025 ccw(c-537.5,1025) -525,1025 cw(c-502.5,1025) -480,1025 ccw(c-467.5,1025) -455,1025 cw(c-432.5,1025) -410,1025 ccw(c-397.5,1025) -385,1025 cw(c-362.5,1025) -340,1025 ccw(c-327.5,1025) -315,1025 cw(c-292.5,1025) -270,1025 ccw(c-257.5,1025) -245,1025 cw(c-222.5,1025) -200,1025 ccw(c-187.5,1025) -175,1025 cw(c-170,1025) -170,1030 -48.28,1030 ccw(c-48.28,1061.83) -25.77,1039.32 cw(c0,1013.55) J1.h19
D9_N: J1.g19 J3.B6 | length 3485.6
  Component Side w5: J3.B6 cw(c-2926.18,1855.47) -2950,1855.47 cw(c-2930.47,1855.47) -2930.47,1875 -2685.1,1875 cw(c-2685.1,1816.72) -2643.88,1857.93 -2643.17,1857.22 ccw(c-2565.39,1935) -2565.39,1825 -1753.97,1825 cw(c-1753.97,1574) -1576.51,1751.51 ; -1576.48,1751.48 -965.59,1140.59 ccw(c-795.17,1311) -795.17,1070 -786.89,1070 -279.44,1070 ccw(c-257.5,1075) -235,1075 cw(c-222.5,1075) -210,1075 ccw(c-187.5,1075) -165.56,1070 62.52,1070 cw(c62.52,1038.21) v2(85,1060.69)
  Solder Side w5: J1.g19 ccw(c50,1086.45) v2@75.77,1060.68 ; v2@75.79,1060.69 v2(85,1060.69)
D9_P: J1.g18 J3.A6 | length 3507.7
  Component Side w5: J3.A6 ccw(c-2985.24,1856.89) -2960,1856.89 -2960,1861.03 cw(c-2936.03,1861.03) -2936.03,1885 -2685.1,1885 cw(c-2685.1,1816.72) -2636.81,1865 -2636.1,1864.29 ccw(c-2565.39,1935) -2565.39,1835 -1745.68,1835 cw(c-1745.68,1594) -1575.27,1764.41 -964.37,1153.52 ccw(c-786.89,1331) -786.89,1080 -275,1080 cw(c-275,1075) -270,1075 ccw(c-257.5,1075) -245,1075 cw(c-222.5,1075) -200,1075 ccw(c-187.5,1075) -175,1075 cw(c-170,1075) -170,1080 62.52,1080 ccw(c62.52,1111.79) v2(85,1089.31)
  Solder Side w5: J1.g18 cw(c50,1063.55) 75.77,1089.32 v2(85,1089.31)
D10_N: J1.h17 J3.D6 | length 3526.1
  Solder Side w5: J3.D6 cw(c-2749.02,1857.64) -2775,1857.64 cw(c-2757.64,1857.64) -2757.64,1875 -2500,1875 ccw(c-2500,1880) -2495,1880 cw(c-2482.5,1880) -2470,1880 ccw(c-2447.5,1880) -2425,1880 cw(c-2412.5,1880) -2400,1880 ccw(c-2377.5,1880) -2355,1880 cw(c-2342.5,1880) -2330,1880 ccw(c-2307.5,1880) -2285,1880 cw(c-2272.5,1880) -2260,1880 ccw(c-2237.5,1880) -2215,1880 cw(c-2202.5,1880) -2190,1880 ccw(c-2167.5,1880) -2145.56,1875 -1723.97,1875 cw(c-1723.97,1624) -1546.51,1801.51 ; -1546.48,1801.48 -988.52,1243.52 ; -988.49,1243.49 ccw(c-811.03,1421) -811.03,1170 -570,1170 ; -580,1170 -554.44,1170 ccw(c-532.5,1175) -510,1175 cw(c-497.5,1175) -485,1175 ccw(c-462.5,1175) -440,1175 cw(c-427.5,1175) -415,1175 ccw(c-392.5,1175) -370,1175 cw(c-357.5,1175) -345,1175 ccw(c-322.5,1175) -300,1175 cw(c-287.5,1175) -275,1175 ccw(c-252.5,1175) -230,1175 cw(c-217.5,1175) -205,1175 ccw(c-182.5,1175) -160.56,1170 -48.28,1170 cw(c-48.28,1138.17) -25.77,1160.68 ccw(c0,1186.45) J1.h17
D10_P: J1.h16 J3.C6 | length 3544.3
  Solder Side w5: J3.C6 ccw(c-2808.07,1854.73) -2785,1854.73 -2785,1860 ; -2785,1861.78 cw(c-2761.78,1861.78) -2761.78,1885 -2504.44,1885 cw(c-2482.5,1880) -2460,1880 ccw(c-2447.5,1880) -2435,1880 cw(c-2412.5,1880) -2390,1880 ccw(c-2377.5,1880) -2365,1880 cw(c-2342.5,1880) -2320,1880 ccw(c-2307.5,1880) -2295,1880 cw(c-2272.5,1880) -2250,1880 ccw(c-2237.5,1880) -2225,1880 cw(c-2202.5,1880) -2180,1880 ccw(c-2167.5,1880) -2155,1880 cw(c-2150,1880) -2150,1885 -1715.68,1885 cw(c-1715.68,1644) -1545.27,1814.41 -981.44,1250.59 ccw(c-811.03,1421) -811.03,1180 -570,1180 ; -580,1180 -550,1180 cw(c-550,1175) -545,1175 ccw(c-532.5,1175) -520,1175 cw(c-497.5,1175) -475,1175 ccw(c-462.5,1175) -450,1175 cw(c-427.5,1175) -405,1175 ccw(c-392.5,1175) -380,1175 cw(c-357.5,1175) -335,1175 ccw(c-322.5,1175) -310,1175 cw(c-287.5,1175) -265,1175 ccw(c-252.5,1175) -240,1175 cw(c-217.5,1175) -195,1175 ccw(c-182.5,1175) -170,1175 cw(c-165,1175) -165,1180 -48.28,1180 ccw(c-48.28,1211.83) -25.77,1189.32 cw(c0,1163.55) J1.h16
D11_N: J1.g16 J3.B7 | length 3487.3
  Component Side w5: J3.B7 cw(c-2926.18,1953.9) -2950,1953.9 cw(c-2928.9,1953.9) -2928.9,1975 -2690.36,1975 cw(c-2690.36,1899.64) -2637.07,1952.93 ccw(c-2569.64,2020.36) -2569.64,1925 -1683.97,1925 cw(c-1683.97,1674) -1506.51,1851.51 ; -1506.48,1851.48 -945.59,1290.59 ccw(c-775.17,1461) -775.17,1220 -766.89,1220 -305,1220 ccw(c-305,1225) -300,1225 cw(c-287.5,1225) -275,1225 ccw(c-252.5,1225) -230,1225 cw(c-217.5,1225) -205,1225 ccw(c-182.5,1225) -160.56,1220 62.52,1220 cw(c62.52,1188.21) v2(85,1210.69)
  Solder Side w5: J1.g16 ccw(c50,1236.45) v2@75.77,1210.68 ; v2@75.79,1210.69 v2(85,1210.69)
D11_P: J1.g15 J3.A7 | length 3506.2
  Component Side w5: J3.A7 ccw(c-2985.24,1955.32) -2960,1955.32 -2960,1959.46 cw(c-2934.46,1959.46) -2934.46,1985 -2690.36,1985 cw(c-2690.36,1899.64) -2630,1960 ccw(c-2569.64,2020.36) -2569.64,1935 -1675.68,1935 cw(c-1675.68,1694) -1505.27,1864.41 -944.37,1303.52 ccw(c-766.89,1481) -766.89,1230 -309.44,1230 cw(c-287.5,1225) -265,1225 ccw(c-252.5,1225) -240,1225 cw(c-217.5,1225) -195,1225 ccw(c-182.5,1225) -170,1225 cw(c-165,1225) -165,1230 62.52,1230 ccw(c62.52,1261.79) v2(85,1239.31)
  Solder Side w5: J1.g15 cw(c50,1213.55) 75.77,1239.32 v2(85,1239.31)
D12_N: J1.h14 J3.D7 | length 3532.2
  Solder Side w5: J3.D7 cw(c-2749.02,1956.06) -2775,1956.06 cw(c-2756.06,1956.06) -2756.06,1975 -2495,1975 ccw(c-2495,1980) -2490,1980 cw(c-2477.5,1980) -2465,1980 ccw(c-2442.5,1980) -2420,1980 cw(c-2407.5,1980) -2395,1980 ccw(c-2372.5,1980) -2350,1980 cw(c-2337.5,1980) -2325,1980 ; -2324.96,1979.41 ccw(c-2302.5,1982.09) -2281.02,1975 -1638.97,1975 cw(c-1638.97,1724) -1461.51,1901.51 ; -1461.48,1901.48 -953.52,1393.52 ; -953.49,1393.49 ccw(c-776.03,1571) -776.04,1320 -764.44,1320 ccw(c-742.5,1325) -720,1325 cw(c-707.5,1325) -695,1325 ccw(c-672.5,1325) -650,1325 cw(c-637.5,1325) -625,1325 ccw(c-602.5,1325) -580,1325 cw(c-567.5,1325) -555,1325 ccw(c-532.5,1325) -510,1325 cw(c-497.5,1325) -485,1325 ccw(c-462.5,1325) -440,1325 cw(c-427.5,1325) -415,1325 ccw(c-392.5,1325) -370,1325 cw(c-357.5,1325) -345,1325 ccw(c-322.5,1325) -300,1325 cw(c-287.5,1325) -275,1325 ccw(c-252.5,1325) -230,1325 cw(c-217.5,1325) -205,1325 ccw(c-182.5,1325) -160.56,1320 -48.28,1320 cw(c-48.28,1288.17) -25.77,1310.68 ccw(c0,1336.45) J1.h14
D12_P: J1.h13 J3.C7 | length 3550.6
  Solder Side w5: J3.C7 ccw(c-2808.07,1953.15) -2785,1953.15 -2785,1956.06 cw(c-2756.06,1956.06) -2756.06,1985 -2499.44,1985 cw(c-2477.5,1980) -2455,1980 ccw(c-2442.5,1980) -2430,1980 cw(c-2407.5,1980) -2385,1980 ccw(c-2372.5,1980) -2360,1980 cw(c-2337.5,1980) -2315,1980.34 ccw(c-2302.5,1982.09) -2289.96,1980.59 cw(c-2285,1980) -2285,1985 -1630.68,1985 cw(c-1630.68,1744) -1460.27,1914.41 -946.44,1400.59 ccw(c-776.03,1571) -776.04,1330 -760,1330 cw(c-760,1325) -755,1325 ccw(c-742.5,1325) -730,1325 cw(c-707.5,1325) -685,1325 ccw(c-672.5,1325) -660,1325 cw(c-637.5,1325) -615,1325 ccw(c-602.5,1325) -590,1325 cw(c-567.5,1325) -545,1325 ccw(c-532.5,1325) -520,1325 cw(c-497.5,1325) -475,1325 ccw(c-462.5,1325) -450,1325 cw(c-427.5,1325) -405,1325 ccw(c-392.5,1325) -380,1325 cw(c-357.5,1325) -335,1325 ccw(c-322.5,1325) -310,1325 cw(c-287.5,1325) -265,1325 ccw(c-252.5,1325) -240,1325 cw(c-217.5,1325) -195,1325 ccw(c-182.5,1325) -170,1325 cw(c-165,1325) -165,1330 -48.28,1330 ccw(c-48.28,1361.83) -25.77,1339.32 cw(c0,1313.55) J1.h13
D13_N: J1.g13 J3.B8 | length 3504.1
  Component Side w5: J3.B8@-2937.98,2040.3 J3.B8 cw(c-2926.18,2052.32) -2950,2052.32 -2950,2055 cw(c-2930,2055) -2930,2075 -2690.36,2075 cw(c-2690.36,1999.64) -2637.07,2052.93 ccw(c-2569.64,2120.36) -2569.64,2025 -1599.83,2025 cw(c-1599.83,1784) -1429.41,1954.41 -915.59,1440.59 ccw(c-745.17,1611) -745.17,1370 -736.89,1370 -344.44,1370 ccw(c-322.5,1375) -300,1375 cw(c-287.5,1375) -275,1375 ccw(c-252.5,1375) -230,1375 cw(c-217.5,1375) -205,1375 ccw(c-182.5,1375) -160.56,1370 62.52,1370 cw(c62.52,1338.21) v2(85,1360.69)
  Solder Side w5: J1.g13 ccw(c50,1386.45) v2@75.77,1360.68 ; v2@75.79,1360.69 v2(85,1360.69)
D13_P: J1.g12 J3.A8 | length 3506.3
  Component Side w5: J3.A8 ccw(c-2985.24,2053.74) -2960,2053.74 -2960,2055 cw(c-2930,2055) -2930,2085 -2690.36,2085 cw(c-2690.36,1999.64) -2630,2060 ccw(c-2569.64,2120.36) -2569.64,2035 -1599.83,2035 cw(c-1599.83,1784) -1422.37,1961.51 ; -1422.34,1961.48 -914.37,1453.52 ccw(c-736.89,1631) -736.89,1380 -340,1380 cw(c-340,1375) -335,1375 ccw(c-322.5,1375) -310,1375 cw(c-287.5,1375) -265,1375 ccw(c-252.5,1375) -240,1375 cw(c-217.5,1375) -195,1375 ccw(c-182.5,1375) -170,1375 cw(c-165,1375) -165,1380 62.52,1380 ccw(c62.52,1411.79) v2(85,1389.31)
  Solder Side w5: J1.g12 cw(c50,1363.55) 75.77,1389.32 v2(85,1389.31)
D14_N: J1.h11 J3.D8 | length 3527.3
  Solder Side w5: J3.D8 cw(c-2749.02,2054.49) -2775,2054.49 cw(c-2754.49,2054.49) -2754.49,2075 -2490,2075 ccw(c-2490,2080) -2485,2080 cw(c-2472.5,2080) -2460,2080 ccw(c-2437.5,2080) -2415,2080 cw(c-2402.5,2080) -2390,2080 ccw(c-2367.5,2080) -2345,2080 cw(c-2332.5,2080) -2320,2080 ccw(c-2297.5,2080) -2275,2080 cw(c-2262.5,2080) -2250,2080 ccw(c-2227.5,2080) -2205,2080 cw(c-2192.5,2080) -2180,2080 ccw(c-2157.5,2080) -2135,2080 cw(c-2122.5,2080) -2110,2080 ccw(c-2087.5,2080) -2065.56,2075 -1564.83,2075 cw(c-1564.83,1834) -1394.41,2004.41 -930.59,1540.59 ccw(c-760.17,1711) -760.17,1470 -575,1470 ; -585,1470 -575,1470 ; J1.h11 cw(c0,1486.45) -25.77,1460.68 ccw(c-48.28,1438.17) -48.28,1470 -160.56,1470 cw(c-182.5,1475) -205,1475 ccw(c-217.5,1475) -230,1475 cw(c-252.5,1475) -275,1475 ccw(c-287.5,1475) -300,1475 cw(c-322.5,1475) -345,1475 ccw(c-357.5,1475) -370,1475 cw(c-392.5,1475) -415,1475 ccw(c-427.5,1475) -440,1475 cw(c-462.5,1475) -485,1475 ccw(c-497.5,1475) -510,1475 cw(c-532.5,1475) -554.44,1470 -575,1470
D14_P: J1.h10 J3.C8 | length 3543.7
  Solder Side w5: J3.C8 ccw(c-2808.07,2051.58) -2785,2051.58 -2785,2054.49 cw(c-2754.49,2054.49) -2754.49,2085 -2494.44,2085 cw(c-2472.5,2080) -2450,2080 ccw(c-2437.5,2080) -2425,2080 cw(c-2402.5,2080) -2380,2080 ccw(c-2367.5,2080) -2355,2080 cw(c-2332.5,2080) -2310,2080 ccw(c-2297.5,2080) -2285,2080 cw(c-2262.5,2080) -2240,2080 ccw(c-2227.5,2080) -2215,2080 cw(c-2192.5,2080) -2170,2080 ccw(c-2157.5,2080) -2145,2080 cw(c-2122.5,2080) -2100,2080 ccw(c-2087.5,2080) -2075,2080 cw(c-2070,2080) -2070,2085 -1564.83,2085 cw(c-1564.83,1834) -1387.37,2011.51 ; -1387.34,2011.48 -929.37,1553.52 ccw(c-751.89,1731) -751.89,1480 -575,1480 ; -585,1480 -550,1480 cw(c-550,1475) -545,1475 ccw(c-532.5,1475) -520,1475 cw(c-497.5,1475) -475,1475 ccw(c-462.5,1475) -450,1475 cw(c-427.5,1475) -405,1475 ccw(c-392.5,1475) -380,1475 cw(c-357.5,1475) -335,1475 ccw(c-322.5,1475) -310,1475 cw(c-287.5,1475) -265,1475 ccw(c-252.5,1475) -240,1475 cw(c-217.5,1475) -195,1475 ccw(c-182.5,1475) -170,1475 cw(c-165,1475) -165,1480 -48.28,1480 ccw(c-48.28,1511.83) -25.77,1489.32 cw(c0,1463.55) J1.h10
D15_N: J1.g10 J3.B9 | length 3501.6
  Component Side w5: J3.B9 -2926.93,2126.93 cw(c-2926.93,2150) -2950,2150 cw(c-2930,2150) -2930,2170 -2685.1,2170 cw(c-2685.1,2111.72) -2643.88,2152.93 -2630.24,2139.29 ccw(c-2559.53,2210) -2559.53,2110 -1504.83,2110 cw(c-1504.83,1869) -1334.41,2039.41 -888.52,1593.52 ; -888.49,1593.49 ccw(c-711.03,1771) -711.03,1520 -414.44,1520 ccw(c-392.5,1525) -370,1525 cw(c-357.5,1525) -345,1525 ccw(c-322.5,1525) -300,1525 cw(c-287.5,1525) -275,1525 ccw(c-252.5,1525) -230,1525 cw(c-217.5,1525) -205,1525 ccw(c-182.5,1525) -160.56,1520 62.52,1520 cw(c62.52,1488.21) v2(85,1510.69)
  Solder Side w5: J1.g10 ccw(c50,1536.45) v2@75.77,1510.68 ; v2@75.79,1510.69 v2(85,1510.69)
D15_P: J1.g9 J3.A9 | length 3521.1
  Component Side w5: J3.A9 -2983.07,2126.93 ccw(c-2983.07,2150) -2960,2150 cw(c-2930,2150) -2930,2180 -2685.1,2180 cw(c-2685.1,2111.72) -2636.81,2160 -2629.03,2152.22 ccw(c-2551.25,2230) -2551.25,2120 -1504.83,2120 cw(c-1504.83,1869) -1327.37,2046.51 ; -1327.34,2046.48 -881.44,1600.59 ccw(c-711.03,1771) -711.03,1530 -410,1530 cw(c-410,1525) -405,1525 ccw(c-392.5,1525) -380,1525 cw(c-357.5,1525) -335,1525 ccw(c-322.5,1525) -310,1525 cw(c-287.5,1525) -265,1525 ccw(c-252.5,1525) -240,1525 cw(c-217.5,1525) -195,1525 ccw(c-182.5,1525) -170,1525 cw(c-165,1525) -165,1530 62.52,1530 ccw(c62.52,1561.79) v2(85,1539.31)
  Solder Side w5: J1.g9 cw(c50,1513.55) 75.77,1539.32 v2(85,1539.31)
D16_N: J1.h8 J3.D9 | length 3535.8
  Solder Side w5: J3.D9 cw(c-2749.02,2152.91) -2775,2152.91 cw(c-2757.91,2152.91) -2757.91,2170 -2485,2170 ccw(c-2485,2175) -2480,2175 cw(c-2467.5,2175) -2455,2175 ccw(c-2432.5,2175) -2410,2175 cw(c-2397.5,2175) -2385,2175 ccw(c-2362.5,2175) -2340,2175 cw(c-2327.5,2175) -2315,2175 ccw(c-2292.5,2175) -2270,2175 cw(c-2257.5,2175) -2245,2175 ccw(c-2222.5,2175) -2200,2175 cw(c-2187.5,2175) -2175,2175 ccw(c-2170,2175) -2170,2170 -1499.83,2170 cw(c-1499.83,1929) -1329.41,2099.41 -920.59,1690.59 ccw(c-750.17,1861) -750.17,1620 -724,1620 ccw(c-724,1625) -719,1625 cw(c-706.5,1625) -694,1625 ccw(c-671.5,1625) -649,1625 cw(c-636.5,1625) -624,1625 ccw(c-601.5,1625) -579,1625 cw(c-566.5,1625) -554,1625 ccw(c-531.5,1625) -509,1625 cw(c-496.5,1625) -484,1625 ccw(c-461.5,1625) -439,1625 cw(c-426.5,1625) -414,1625 ccw(c-391.5,1625) -369,1625 cw(c-356.5,1625) -344,1625 ccw(c-321.5,1625) -299,1625 cw(c-286.5,1625) -274,1625 ccw(c-251.5,1625) -229,1625 cw(c-216.5,1625) -204,1625 ccw(c-181.5,1625) -159.56,1620 -48.28,1620 cw(c-48.28,1588.17) -25.77,1610.68 ccw(c0,1636.45) J1.h8
D16_P: J1.h7 J3.C9 | length 3545.7
  Solder Side w5: J3.C9 ccw(c-2808.07,2150) -2785,2150 -2785,2152.91 cw(c-2757.91,2152.91) -2757.91,2180 -2489.44,2180 cw(c-2467.5,2175) -2445,2175 ccw(c-2432.5,2175) -2420,2175 cw(c-2397.5,2175) -2375,2175 ccw(c-2362.5,2175) -2350,2175 cw(c-2327.5,2175) -2305,2175 ccw(c-2292.5,2175) -2280,2175 cw(c-2257.5,2175) -2235,2175 ccw(c-2222.5,2175) -2210,2175 cw(c-2187.5,2175) -2165.56,2180 -1499.83,2180 cw(c-1499.83,1929) -1322.37,2106.51 ; -1322.34,2106.48 -919.37,1703.52 ccw(c-741.89,1881) -741.89,1630 -728.44,1630 cw(c-706.5,1625) -684,1625 ccw(c-671.5,1625) -659,1625 cw(c-636.5,1625) -614,1625 ccw(c-601.5,1625) -589,1625 cw(c-566.5,1625) -544,1625 ccw(c-531.5,1625) -519,1625 cw(c-496.5,1625) -474,1625 ccw(c-461.5,1625) -449,1625 cw(c-426.5,1625) -404,1625 ccw(c-391.5,1625) -379,1625 cw(c-356.5,1625) -334,1625 ccw(c-321.5,1625) -309,1625 cw(c-286.5,1625) -264,1625 ccw(c-251.5,1625) -239,1625 cw(c-216.5,1625) -194,1625 ccw(c-181.5,1625) -169,1625 cw(c-164,1625) -164,1630 -48.28,1630 ccw(c-48.28,1661.83) -25.77,1639.32 cw(c0,1613.55) J1.h7
D17_N: J1.g7 J3.D10 | length 3455.3
  Component Side w5: J3.D10 cw(c-2749.02,2249.88) -2773.54,2249.88 cw(c-2743.43,2249.88) -2743.43,2280 -2714.73,2280 cw(c-2714.73,2174.32) -2640.04,2249.09 cw(c-2714.73,2174.32) -2640,2249.05 -2630.24,2239.29 ccw(c-2559.53,2310) -2559.53,2210 -1434.83,2210 cw(c-1434.83,1969) -1264.41,2139.41 -868.52,1743.52 ; -868.49,1743.49 ccw(c-691.03,1921) -691.03,1670 -655,1670 ccw(c-655,1675) -650,1675 cw(c-637.5,1675) -625,1675 ccw(c-602.5,1675) -580,1675 cw(c-567.5,1675) -555,1675 ccw(c-532.5,1675) -510,1675 cw(c-497.5,1675) -485,1675 ccw(c-462.5,1675) -440,1675 cw(c-427.5,1675) -415,1675 ccw(c-392.5,1675) -370,1675 cw(c-357.5,1675) -345,1675 ccw(c-322.5,1675) -300,1675 cw(c-287.5,1675) -275,1675 ccw(c-252.5,1675) -230,1675 cw(c-217.5,1675) -205,1675 ccw(c-182.5,1675) -160.56,1670 62.52,1670 cw(c62.52,1638.21) v2(85,1660.69)
  Solder Side w5: J1.g7 ccw(c50,1686.45) v2@75.77,1660.68 ; v2@75.79,1660.69 v2(85,1660.69)
D17_P: J1.g6 J3.C10 | length 3472.4
  Component Side w5: J3.C10 ccw(c-2808.07,2249.88) -2783.54,2249.88 -2783.54,2254.02 cw(c-2747.57,2254.02) -2747.57,2290 -2710.59,2290 cw(c-2710.59,2184.32) -2635.86,2259.05 -2629.03,2252.22 ccw(c-2551.25,2330) -2551.25,2220 -1434.83,2220 cw(c-1434.83,1969) -1257.34,2146.48 -955.86,1845 -880,1769.14 -861.44,1750.59 ccw(c-691.03,1921) -691.03,1680 -659.44,1680 cw(c-637.5,1675) -615,1675 ccw(c-602.5,1675) -590,1675 cw(c-567.5,1675) -545,1675 ccw(c-532.5,1675) -520,1675 cw(c-497.5,1675) -475,1675 ccw(c-462.5,1675) -450,1675 cw(c-427.5,1675) -405,1675 ccw(c-392.5,1675) -380,1675 cw(c-357.5,1675) -335,1675 ccw(c-322.5,1675) -310,1675 cw(c-287.5,1675) -265,1675 ccw(c-252.5,1675) -240,1675 cw(c-217.5,1675) -195,1675 ccw(c-182.5,1675) -170,1675 cw(c-165,1675) -165,1680 62.52,1680 ccw(c62.52,1711.79) v2(85,1689.31)
  Solder Side w5: J1.g6 cw(c50,1663.55) 75.77,1689.32 v2(85,1689.31)
DCLK1_N: J1.h5 J3.B10 | length 3469.2
  Component Side w5: J3.B10 cw(c-2926.18,2249.88) -2950.71,2249.88 -2950.71,2270.79 cw(c-2895.72,2270.79) -2934.6,2309.67 cw(c-2873.45,2248.52) -2873.45,2335 -1464.83,2335 cw(c-1464.83,2094) -1294.41,2264.41 -870.59,1840.59 ccw(c-700.17,2011) -700.17,1770 -649.44,1770 ccw(c-627.5,1775) -605,1775 cw(c-592.5,1775) -580,1775 ccw(c-557.5,1775) -535,1775 cw(c-522.5,1775) -510,1775 ccw(c-487.5,1775) -465,1775 cw(c-452.5,1775) -440,1775 ccw(c-417.5,1775) -395,1775 cw(c-382.5,1775) -370,1775 ccw(c-347.5,1775) -325,1775 cw(c-312.5,1775) -300,1775 ccw(c-295,1775) -295,1770 -250,1770 -187.48,1770 cw(c-187.48,1738.21) v2(-165,1760.69)
  Solder Side w5: v2(-165,1760.69) cw(c-154.59,1760.69) -161.96,1768.04 -160,1770 -48.28,1770 cw(c-48.28,1738.17) -25.77,1760.68 ccw(c0,1786.45) J1.h5
DCLK1_P: J1.h4 J3.A10 | length 3473.1
  Component Side w5: J3.A10 ccw(c-2985.24,2249.88) -2960.71,2249.88 -2960.71,2270.79 cw(c-2895.72,2270.79) -2942.01,2316.41 cw(c-2895.72,2270.79) -2941.67,2316.74 cw(c-2873.45,2248.52) -2873.45,2345 -1464.83,2345 cw(c-1464.83,2094) -1287.34,2271.48 -869.37,1853.52 ccw(c-691.89,2031) -691.89,1780 -645,1780 cw(c-645,1775) -640,1775 ccw(c-627.5,1775) -615,1775 cw(c-592.5,1775) -570,1775 ccw(c-557.5,1775) -545,1775 cw(c-522.5,1775) -500,1775 ccw(c-487.5,1775) -475,1775 cw(c-452.5,1775) -430,1775 ccw(c-417.5,1775) -405,1775 cw(c-382.5,1775) -360,1775 ccw(c-347.5,1775) -335,1775 cw(c-312.5,1775) -290.56,1780 -250,1780 -187.48,1780 ccw(c-187.48,1811.79) -187.4,1780 ccw(c-187.48,1811.79) v2(-165,1789.31)
  Solder Side w5: v2@-160,1780 -48.28,1780 ccw(c-48.28,1811.83) -25.77,1789.32 cw(c0,1763.55) J1.h4
DCLK2_N: J1.g3 J3.B1 | length 4430.7
  Component Side w5: J3.B1 cw(c-2926.18,1363.35) -2949.72,1359.72 cw(c-2926.18,1363.35) -2950,1363.35 -2950,1368.91 ccw(c-2976.09,1368.91) -2976.09,1395 -2981.46,1395 cw(c-2981.46,1443.54) -3030,1443.54 -3030,2250 cw(c-2890,2250) -2890,2390 -1384.83,2390 cw(c-1384.83,2149) -1214.41,2319.41 -835.59,1940.59 ccw(c-665.17,2111) -665.17,1870 62.52,1870 cw(c62.52,1838.21) v2(85,1860.69)
  Solder Side w5: -2946.51,1359.85 J3.B1 ; J1.g3 ccw(c50,1886.45) v2@75.77,1860.68 ; v2@75.79,1860.69 v2(85,1860.69)
DCLK2_P: J1.g2 J3.A1 | length 4426.6
  Component Side w5: J3.A1@-2977.11,1342.89 cw(c-2985.24,1351.03) J3.A1 ccw(c-2985.24,1364.76) -2960.57,1359.43 ccw(c-2985.24,1364.76) -2960,1364.76 ccw(c-2980.24,1364.76) -2980.24,1385 -2985.61,1385 cw(c-2985.61,1439.39) -3040,1439.39 -3040,2250 cw(c-2890,2250) -2890,2400 -1384.83,2400 cw(c-1384.83,2149) -1207.34,2326.48 -1025.86,2145 -834.37,1953.52 ccw(c-656.89,2131) -656.89,1880 62.52,1880 ccw(c62.52,1911.79) v2(85,1889.31)
  Solder Side w5: J1.g2 cw(c50,1863.55) 75.77,1889.32 v2(85,1889.31)
GA0: J1.c34 U2.1
GA1: J1.d35 U2.2
GND: C1.1 C2.1 C3.1 J1.c1 J1.c4 J1.c5 J1.c8 J1.c9 J1.c12 J1.c13 J1.c16 J1.c17 J1.c20 J1.c21 J1.c24 J1.c25 J1.c28 J1.c29 J1.c32 J1.c33 J1.c36 J1.c38 J1.c40 J1.d2 J1.d3 J1.d6 J1.d7 J1.d10 J1.d13 J1.d16 J1.d19 J1.d22 J1.d25 J1.d28 J1.d37 J1.d39 J1.g1 J1.g4 J1.g5 J1.g8 J1.g11 J1.g14 J1.g17 J1.g20 J1.g23 J1.g26 J1.g29 J1.g32 J1.g35 J1.g38 J1.g40 J1.h2 J1.h3 J1.h6 J1.h9 J1.h12 J1.h15 J1.h18 J1.h21 J1.h24 J1.h27 J1.h30 J1.h33 J1.h36 J1.h39 J2.BG1 J2.BG2 J2.BG3 J2.BG4 J2.BG5 J2.BG6 J2.BG7 J2.BG8 J2.BG9 J2.BG10 J2.DG1 J2.DG2 J2.DG3 J2.DG4 J2.DG5 J2.DG6 J2.DG7 J2.DG8 J2.DG9 J2.DG10 J3.BG1 J3.BG2 J3.BG3 J3.BG4 J3.BG5 J3.BG6 J3.BG7 J3.BG8 J3.BG9 J3.BG10 J3.DG1 J3.DG2 J3.DG3 J3.DG4 J3.DG5 J3.DG6 J3.DG7 J3.DG8 J3.DG9 J3.DG10 U1.11 U2.3 U2.4 U2.7 | length 2262.7
  Solder Side w10: J1.h36 v1(25,225) J1.g35 ; J1.h33 v1(25,375) J1.g32 ; J1.h30 v1(25,525) J1.g29 ; J1.h27 v1(25,675) J1.g26 ; J1.h24 v1(25,825) J1.g23 ; J1.h21 v1(25,975) J1.g20 ; J1.h18 v1(25,1125) J1.g17 ; J1.h15 v1(25,1275) J1.g14 ; J1.h12 v1(25,1425) J1.g11 ; J1.h9 v1(25,1575) J1.g8 ; J1.h6 v1(25,1725) J1.g5 ; J1.h3 v1(25,1825) J1.g4 ; J1.h2 v1(25,1925) J1.g1 ; J1.g40 v1(25,25) J1.h39 v1(25,75) J1.g38 ; J1.d37 v1(225,175) J1.c36 ; J1.d28 v1(225,575) ; J1.d25 v1(225,775) ; J1.d22 v1(225,925) J1.c21 ; J1.d19 v1(225,1025) J1.c20 ; J1.d16 v1(225,1175) ; J1.d13 v1(225,1375) ; J1.d10 v1(225,1525) J1.c9 ; J1.d7 v1(225,1625) J1.c8 ; J1.d6 v1(225,1725) J1.c5 ; J1.d3 v1(225,1825) J1.c4 ; J1.d2 v1(225,1925) J1.c1 ; J1.c40 v1(225,25) J1.d39 v1(225,75) J1.c38 ; J1.c33 v1(225,375) J1.c32 ; J1.c29 v1(225,575) ; J1.c28 v1(225,575) ; J1.c25 v1(225,775) ; J1.c24 v1(225,775) ; J1.c17 v1(225,1175) ; J1.c16 v1(225,1175) ; J1.c13 v1(225,1375) ; J1.c12 v1(225,1375)
  other v1: -220,390 -220,455 105,590 105,660 105,740 105,815 105,890 105,960 105,1040 105,1110 105,1190 105,1260 105,1340 105,1410 105,1490 105,1560 105,1640 105,1710 -190,1745 -190,1805 105,1840 105,1910
I/O_1: J1.c22 J2.B10 | length 3720.6
  Component Side w10: J2.B10 -2874.76,780 -2630,780 -2050,200 -1150,200 -1050,300 -200,300
  Solder Side w10: J1.c22 350,900 450,800 450,350
I/O_2: J1.c23 J2.A10 | length 3800.3
  Component Side w10: J2.A10 -2908.82,805 -2555,805 -2000,250 -1150,250 -1050,350 -50,350
  Solder Side w10: J1.c23 400,700 400,350
I/O_3: J1.d23 J2.B9 | length 3414.6
  Component Side w10: J2.B9 -2876.34,680 -2630,680 -2100,150 -1150,150 -1050,250 -200,250
  Solder Side w10: 85,495 85,525 135,575 135,755 130,760 130,780 J1.d23
I/O_4: J1.d24 J2.A9 | length 3390.6
  Component Side w10: J2.A9 -2935.08,580 -2636.81,580 -2156.81,100 -1150,100 -1050,200 -200,200
  Solder Side w10: 105,495 105,515 155,565 155,755 J1.d24
NetJ1_d30: J1.d30 J1.d31 | length 50
  Solder Side w10: J1.d31 J1.d30
SCL: J1.c30 U2.6
SCLK_C: U1.5 | length 201.1
  Solder Side w10: U1.5 -382.36,-2.36
SCLK_M: J2.B6 U1.16 | length 2265.9
  Solder Side w10: J2.B6 -2881.3,290 -2636.81,290 -2344.45,-2.36 U1.16
SDA: J1.c31 U2.5
SDI_C: U1.6 | length 200.5
  Solder Side w10: U1.6 -382.95,-27.95
SDI_M: J2.B5 U1.15 | length 2235.7
  Solder Side w10: J2.B5 -2879.72,190 -2636.81,190 -2418.86,-27.95 U1.15
SDO_C: U1.7 | length 194.9
  Solder Side w10: U1.7 -388.54,-53.54
SDO_M: J2.B4 U1.14 | length 2205.5
  Solder Side w10: J2.B4 -2878.15,90 -2635,90 -2491.46,-53.54 U1.14
VADJ: C2.2 J1.g39 U1.2 | length 157.9
  Solder Side w10: U1.2 -425.59,74.41
pads on no net: B1.1 B2.1 J1.1 J1.2 J1.c2 J1.c3 J1.c6 J1.c7 J1.c10 J1.c11 J1.c14 J1.c15 J1.c18 J1.c19 J1.d1 J1.d4 J1.d5 J1.d8 J1.d9 J1.d11 J1.d12 J1.d14 J1.d15 J1.d17 J1.d18 J1.d20 J1.d21 J1.d29 J1.d33 J1.d34 J1.g30 J1.g31 J1.g33 J1.g34 J1.g36 J1.g37 J1.h1 J1.h37 J1.h38 J1.h40 J2.A1 J2.A2 J2.A7 J2.A8 J2.B1 J2.B2 J2.B3 J2.B7 J2.B8 J2.C1 J2.C2 J2.C3 J2.C4 J2.C5 J2.C6 J2.C7 J2.C8 J2.C9 J2.C10 J2.D1 J2.D2 J2.D3 J2.D4 J2.D5 J2.D6 J2.D7 J2.D8 J2.D9 J2.D10 U1.1 U1.10 U1.20

## Polygon pours and split planes (outlines as drawn)
GND on Ground Plane (split plane): -1040.77,2333.62 -1040.38,2329.7 -1039.24,2325.93 -1037.38,2322.46 -1034.88,2319.41 -1031.84,2316.91 -1028.36,2315.05 -1024.59,2313.91 -1020.67,2313.52 455.3,2313.52 455.3,-362.82 -1020.67,-362.82 -1024.59,-363.2 -1028.36,-364.35 -1031.84,-366.2 -1034.88,-368.7 -1037.38,-371.75 -1039.24,-375.22 -1040.38,-378.99 -1040.77,-382.91 -1040.77,-717.15 -3047.82,-717.15 -3047.82,2589.12 -1040.77,2589.12
no net on Power Plane (split plane): -1040.77,2333.62 -1040.38,2329.7 -1039.24,2325.93 -1037.38,2322.46 -1034.88,2319.41 -1031.84,2316.91 -1028.36,2315.05 -1024.59,2313.91 -1020.67,2313.52 455.3,2313.52 455.3,-362.82 -1020.67,-362.82 -1024.59,-363.2 -1028.36,-364.35 -1031.84,-366.2 -1034.88,-368.7 -1037.38,-371.75 -1039.24,-375.22 -1040.38,-378.99 -1040.77,-382.91 -1040.77,-717.15 -3047.82,-717.15 -3047.82,2589.12 -1040.77,2589.12

## Other copper
Component Side:
  text "FMC-Interposer" at -2935,1135 h60
  text "2016-03" at -2950,1020 h60
  text "TOP" at -271.36,-317.21 h50

## Silkscreen, mask and mechanical layers (free items; w line width, h text height)
Mechanical 1:
  the board outline again, w10

## Dimensions
-1020.67,-737.24 to -1020.67,2609.21 on Mechanical 1
-3067.91,-737.24 to 475.39,-382.91 on Mechanical 1

## Text inside footprints (layer, text, board x,y; h text height)
J1: Bottom Overlay "1" at -192.82,1975.67 h39.37 r180; Bottom Overlay "40" at -155,-100 h39.37 r270; Bottom Overlay "g" at 37.18,2150.67 h39.37 r180; Bottom Overlay "h" at -15,2155 h39.37 r180; Bottom Overlay "c" at 240,2155 h39.37 r180; Bottom Overlay "d" at 185.81,2155.67 h39.37 r180; Mechanical 14 "1" at -192.82,1975.67 h39.37 r180; Mechanical 14 "40" at -155,-100 h39.37 r270; Mechanical 14 "g" at 37.18,2150.67 h39.37 r180; Mechanical 14 "h" at -15,2155 h39.37 r180; Mechanical 14 "d" at 185.81,2155.67 h39.37 r180; Mechanical 14 "c" at 240,2155 h39.37 r180